# Altium PCB Player.PcbDoc (part 1 of 2)
Units mil, origin at the board's own origin, x right, y up, seen from the top; angles counter-clockwise.
Board outline 1181.1 x 2755.91 mil, 6 copper layers (Top Layer, Mid-Layer 1, Mid-Layer 2, Mid-Layer 3, Mid-Layer 4, Bottom Layer); 169 components, 289 nets, 1099 pads, 96 vias.
Unrouted connection lines stored in the file: 590.
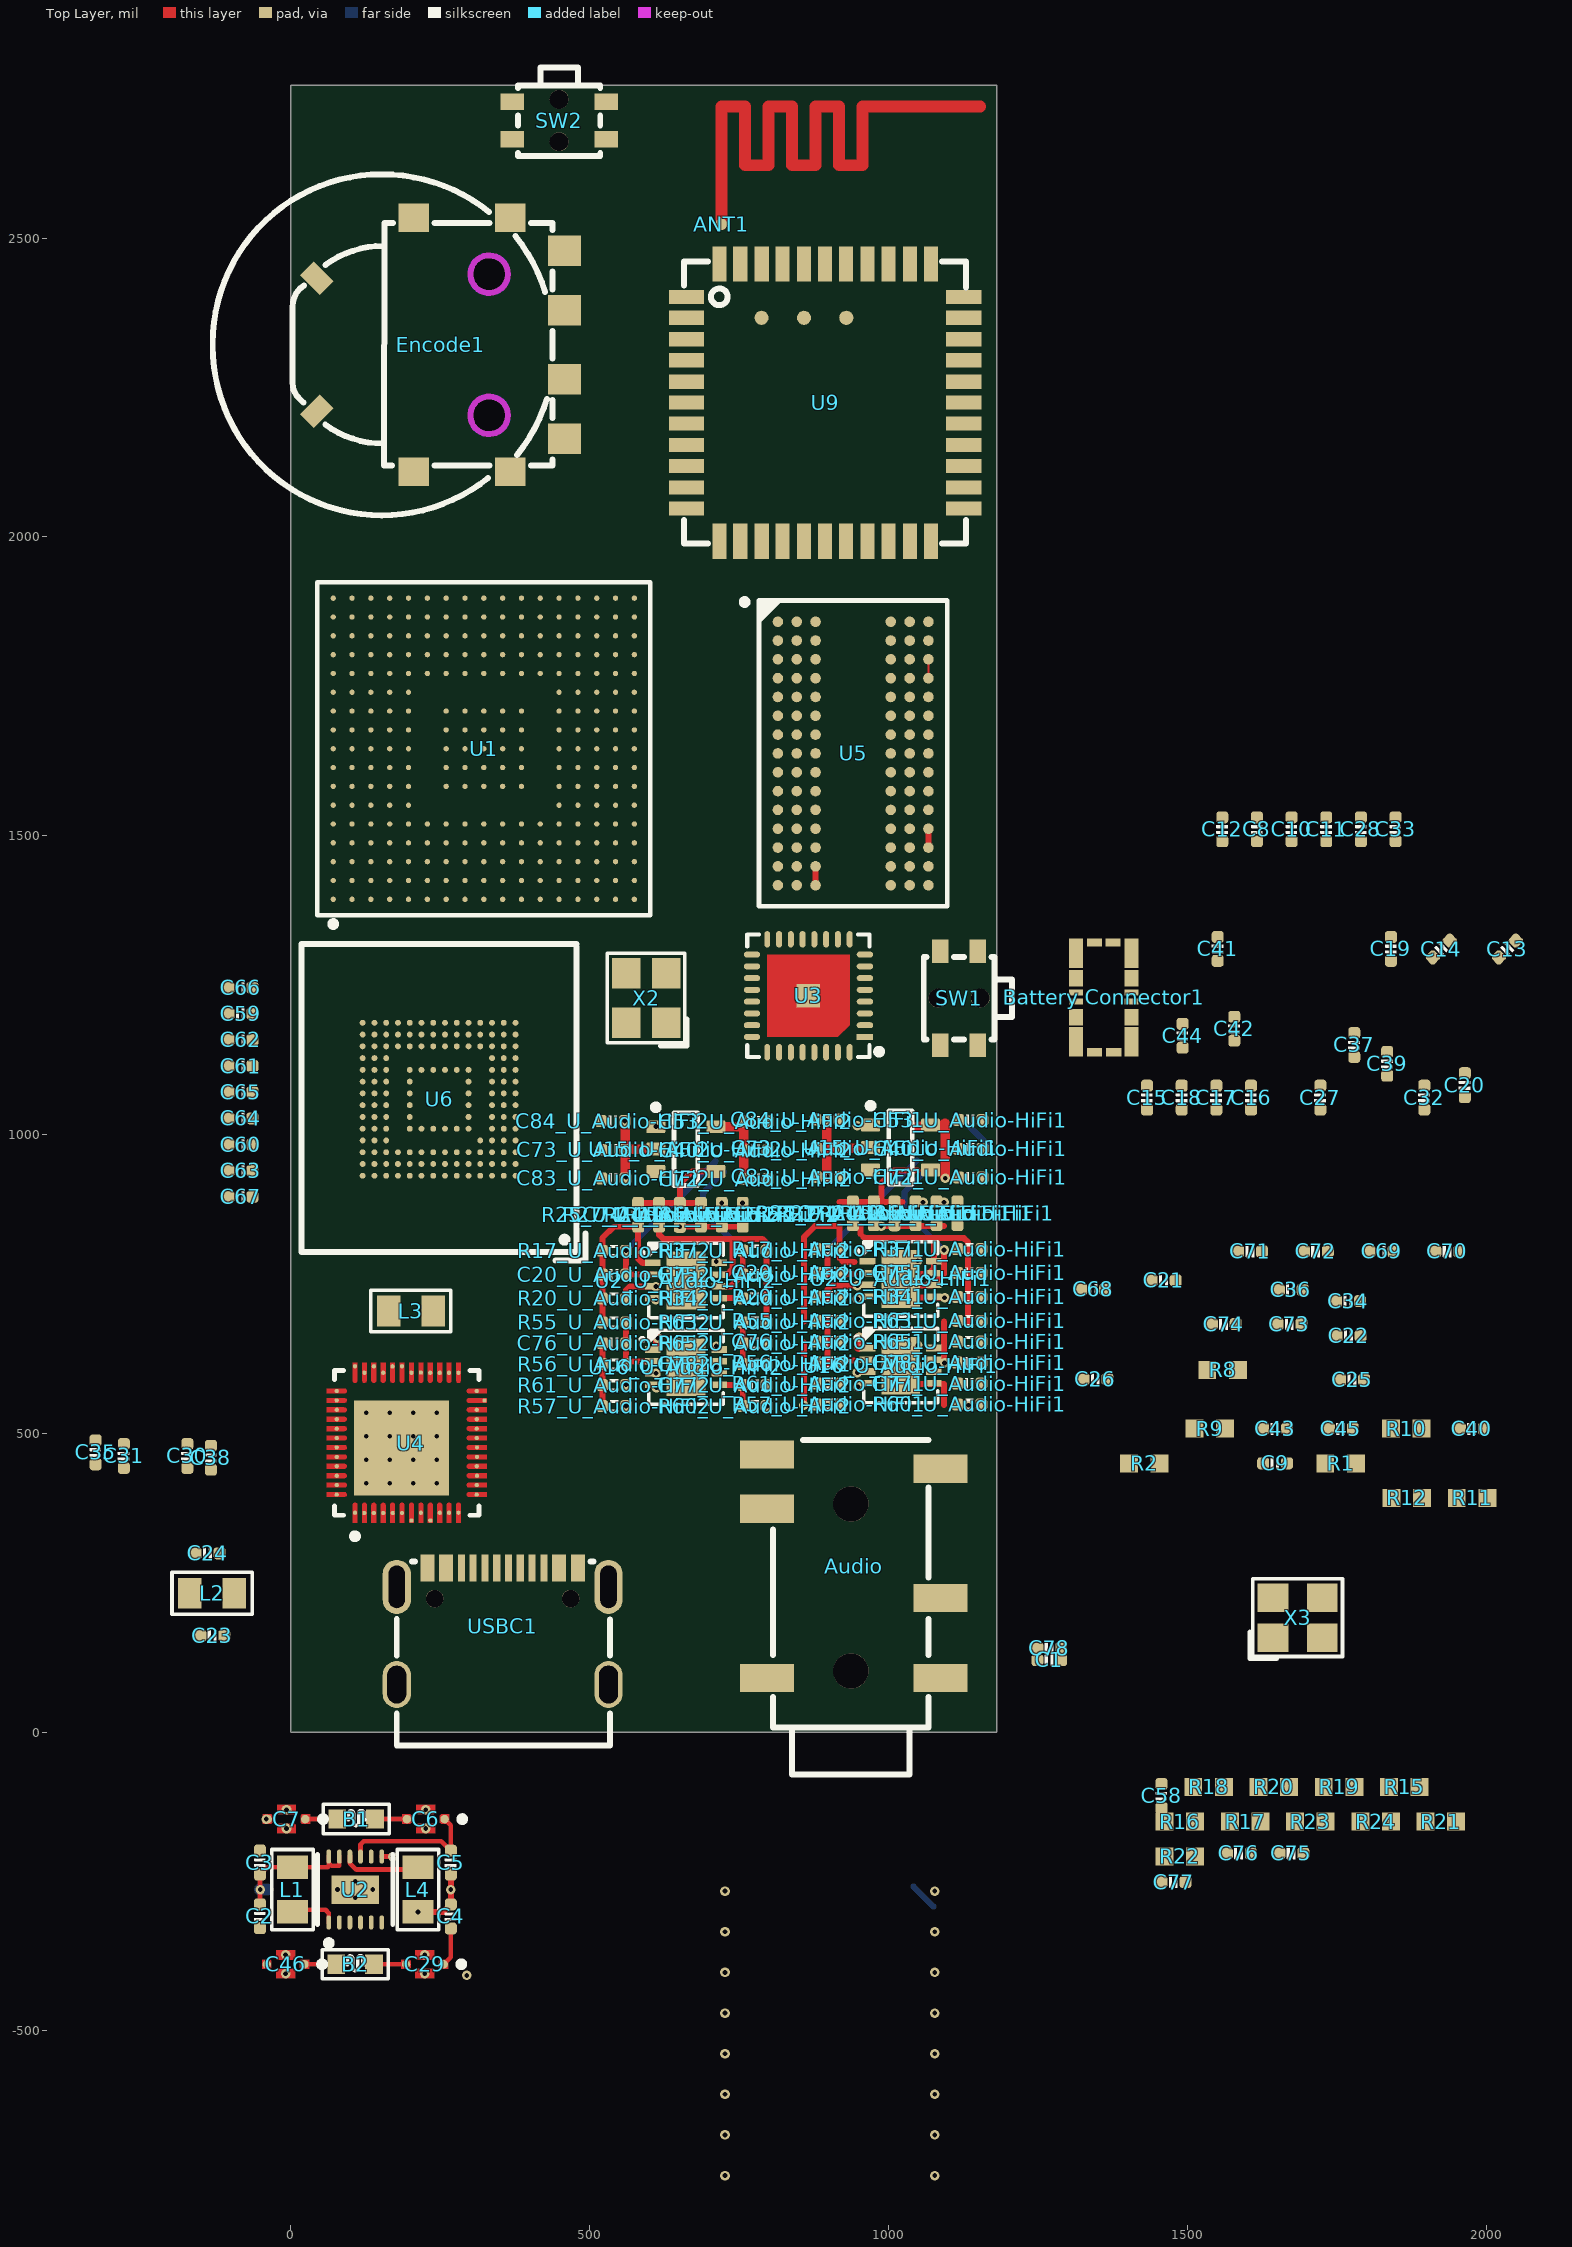
[diagram p0: Top Layer view]
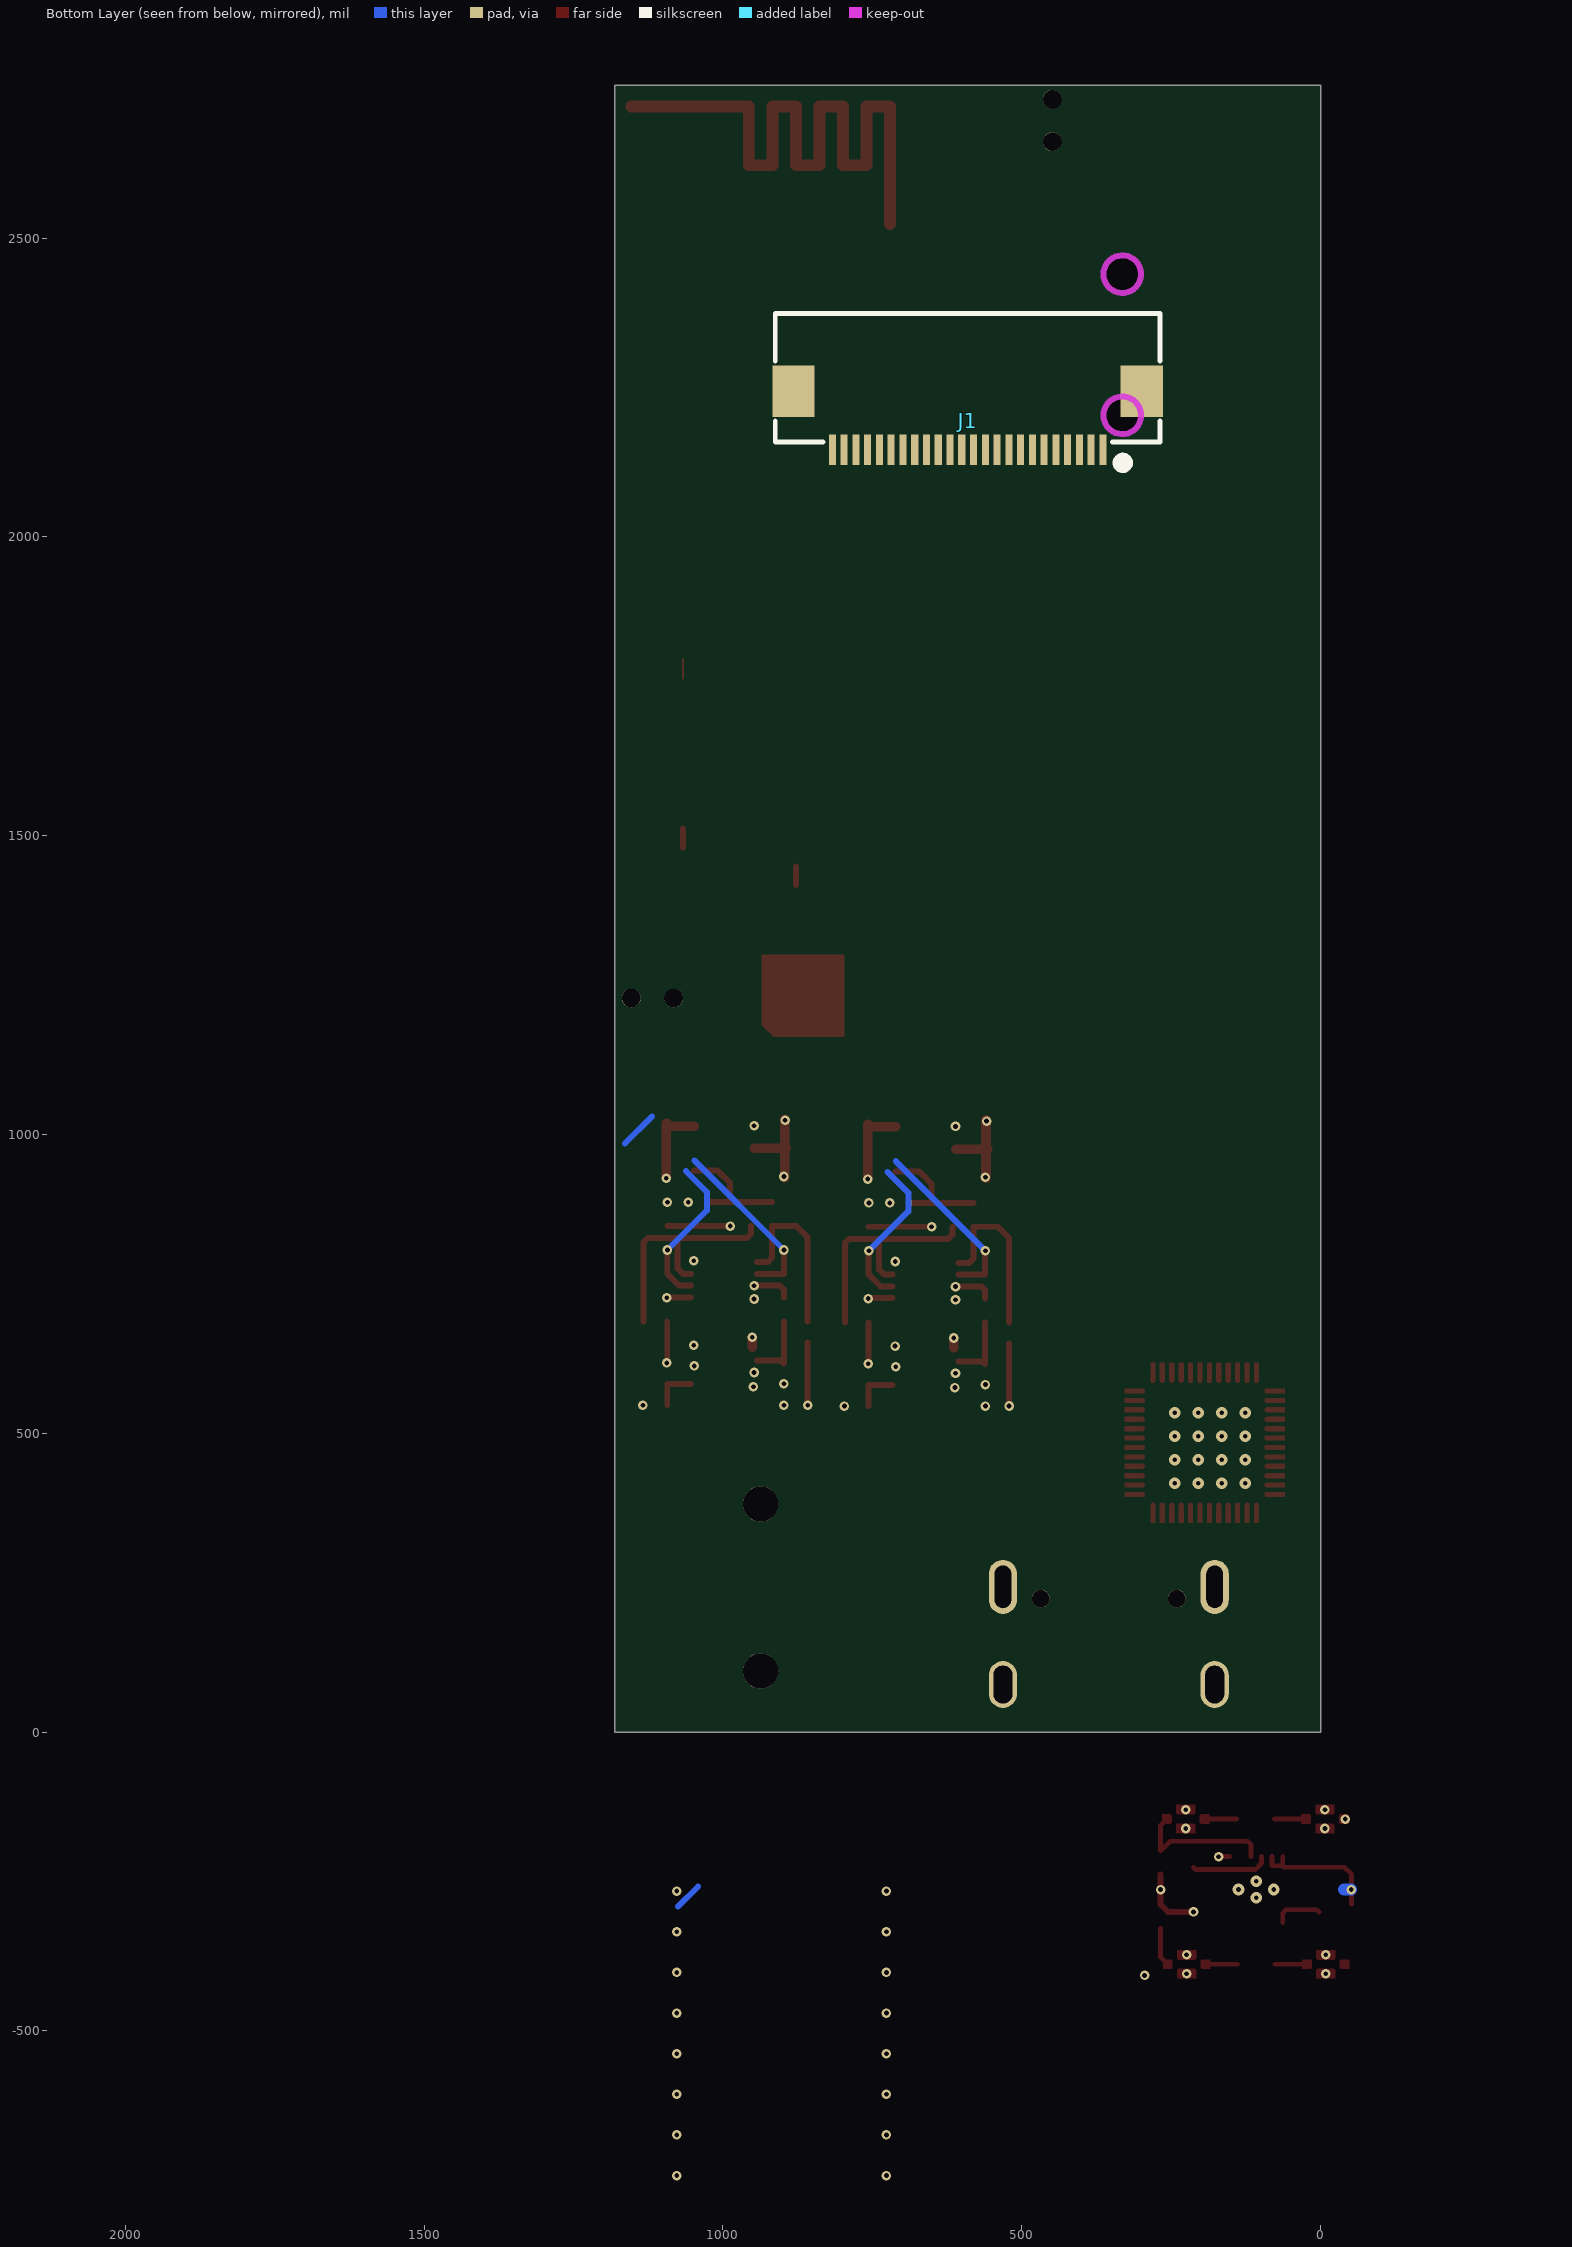
[diagram p1: Bottom Layer view, seen from below]
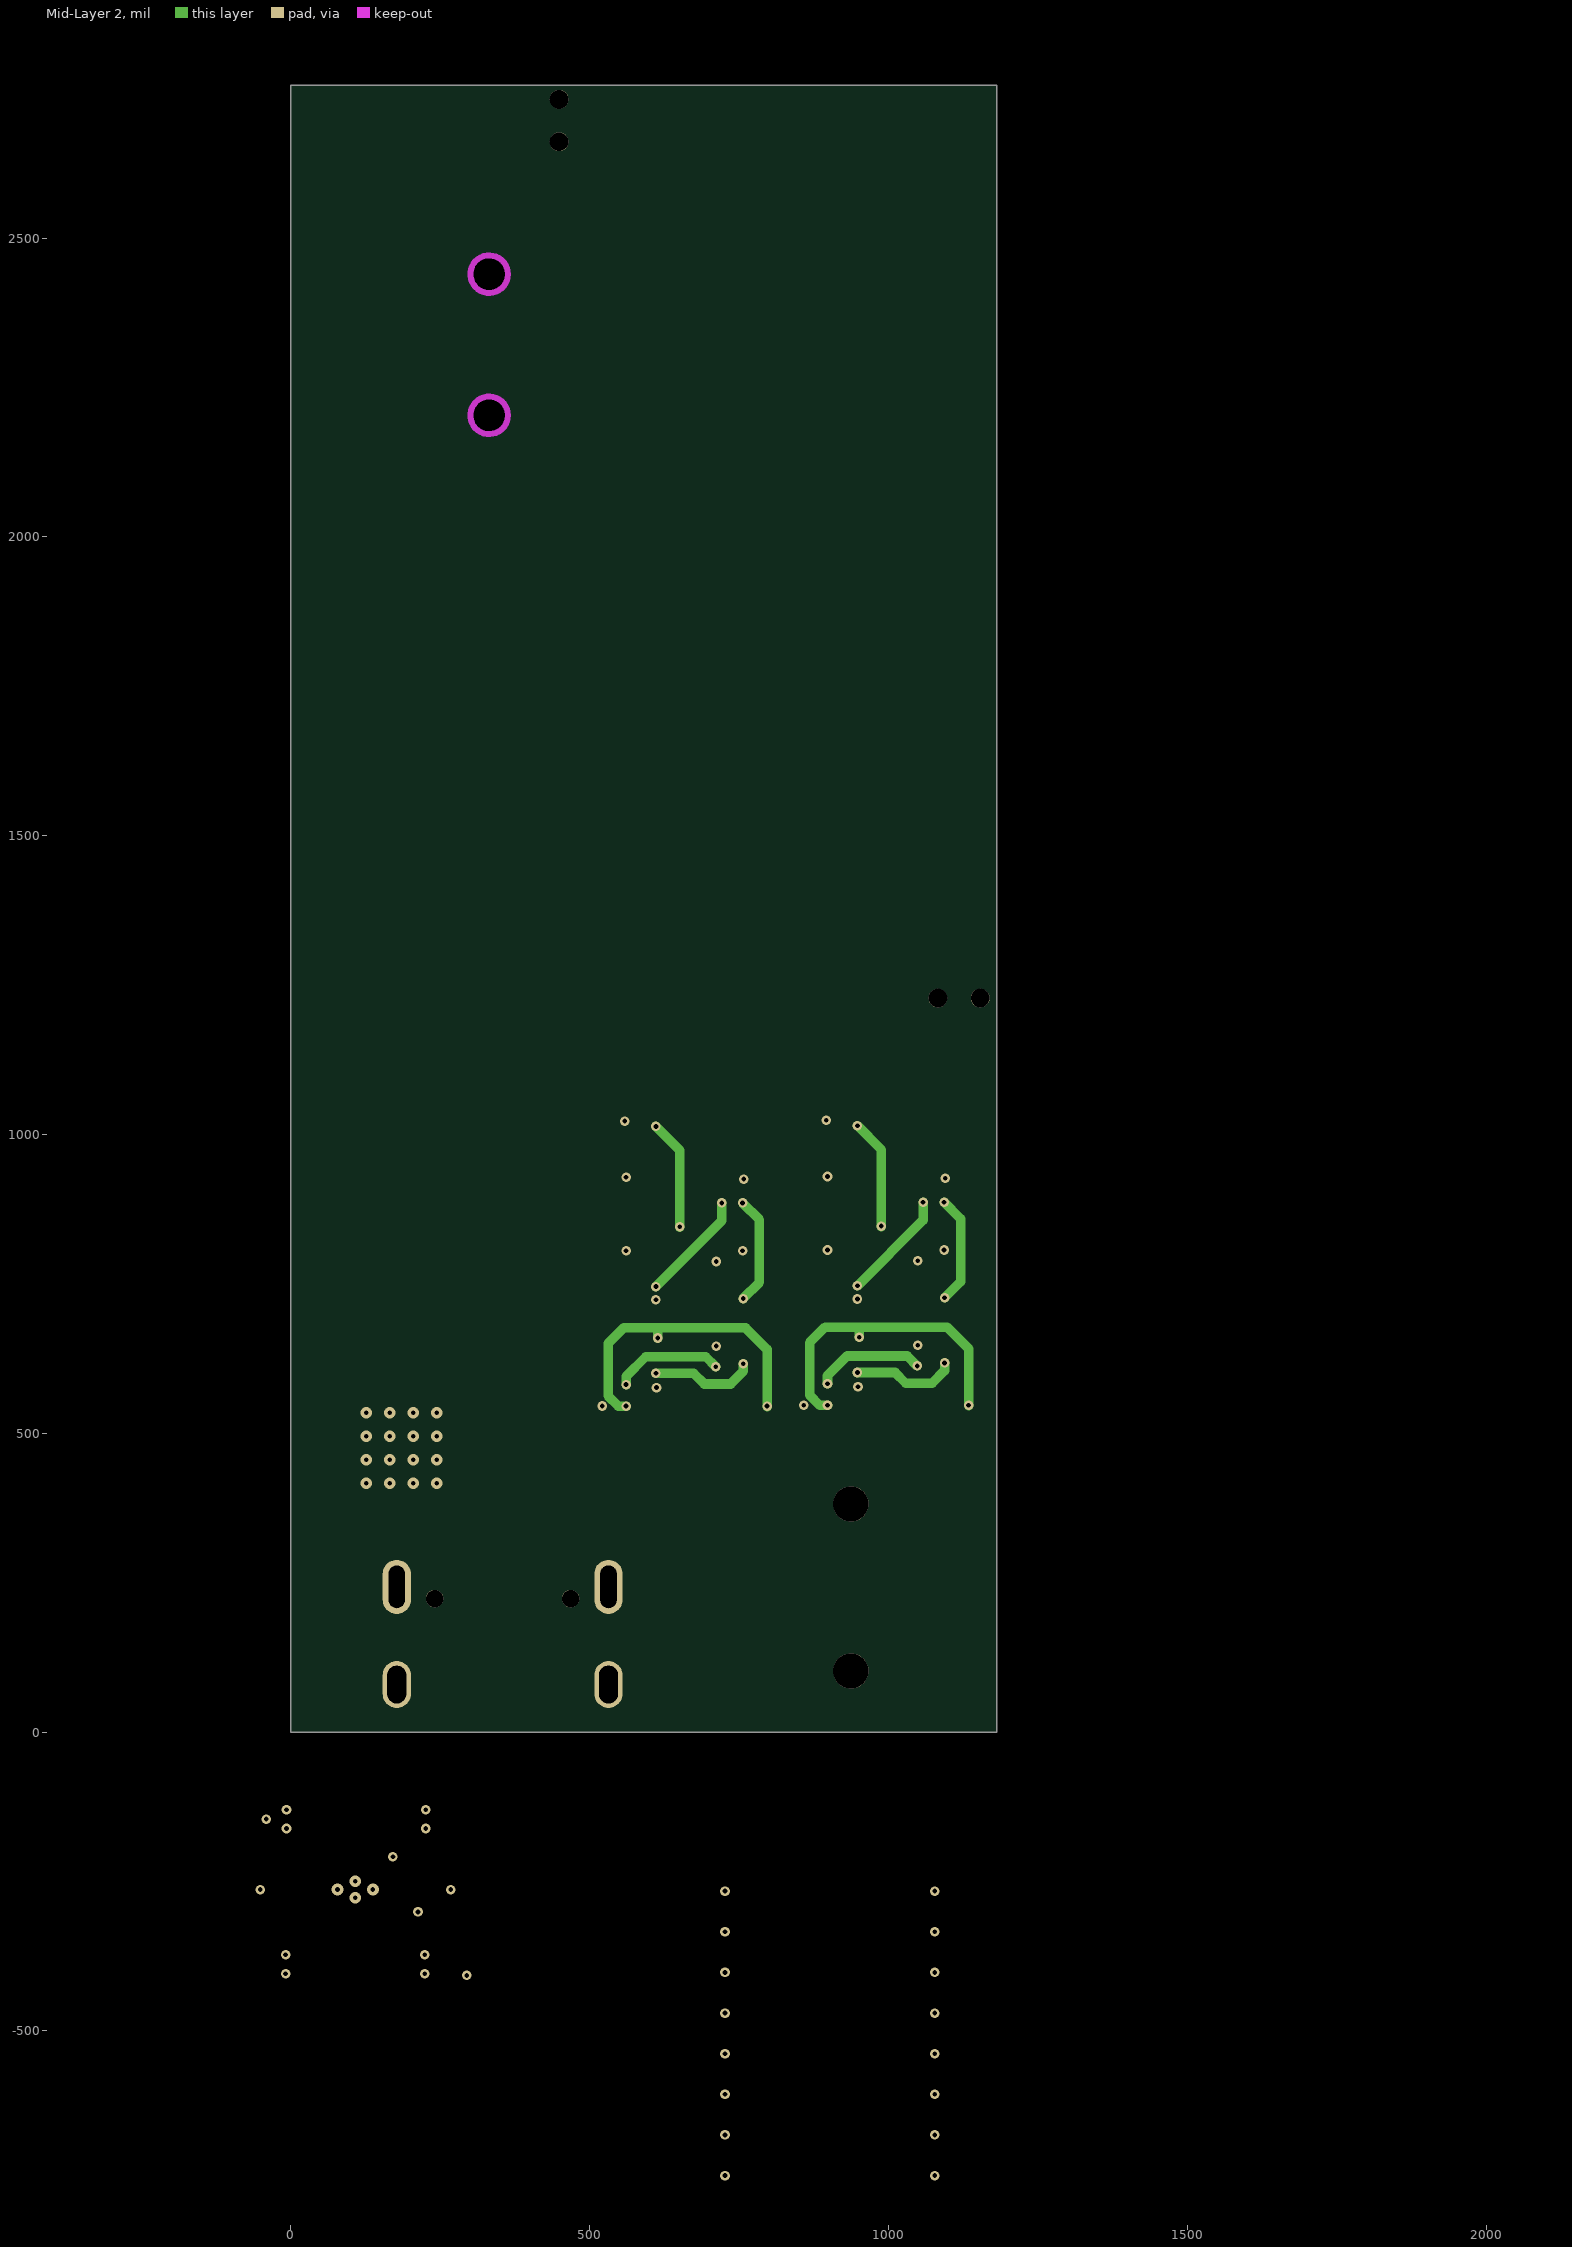
[diagram p2: Mid-Layer 2]
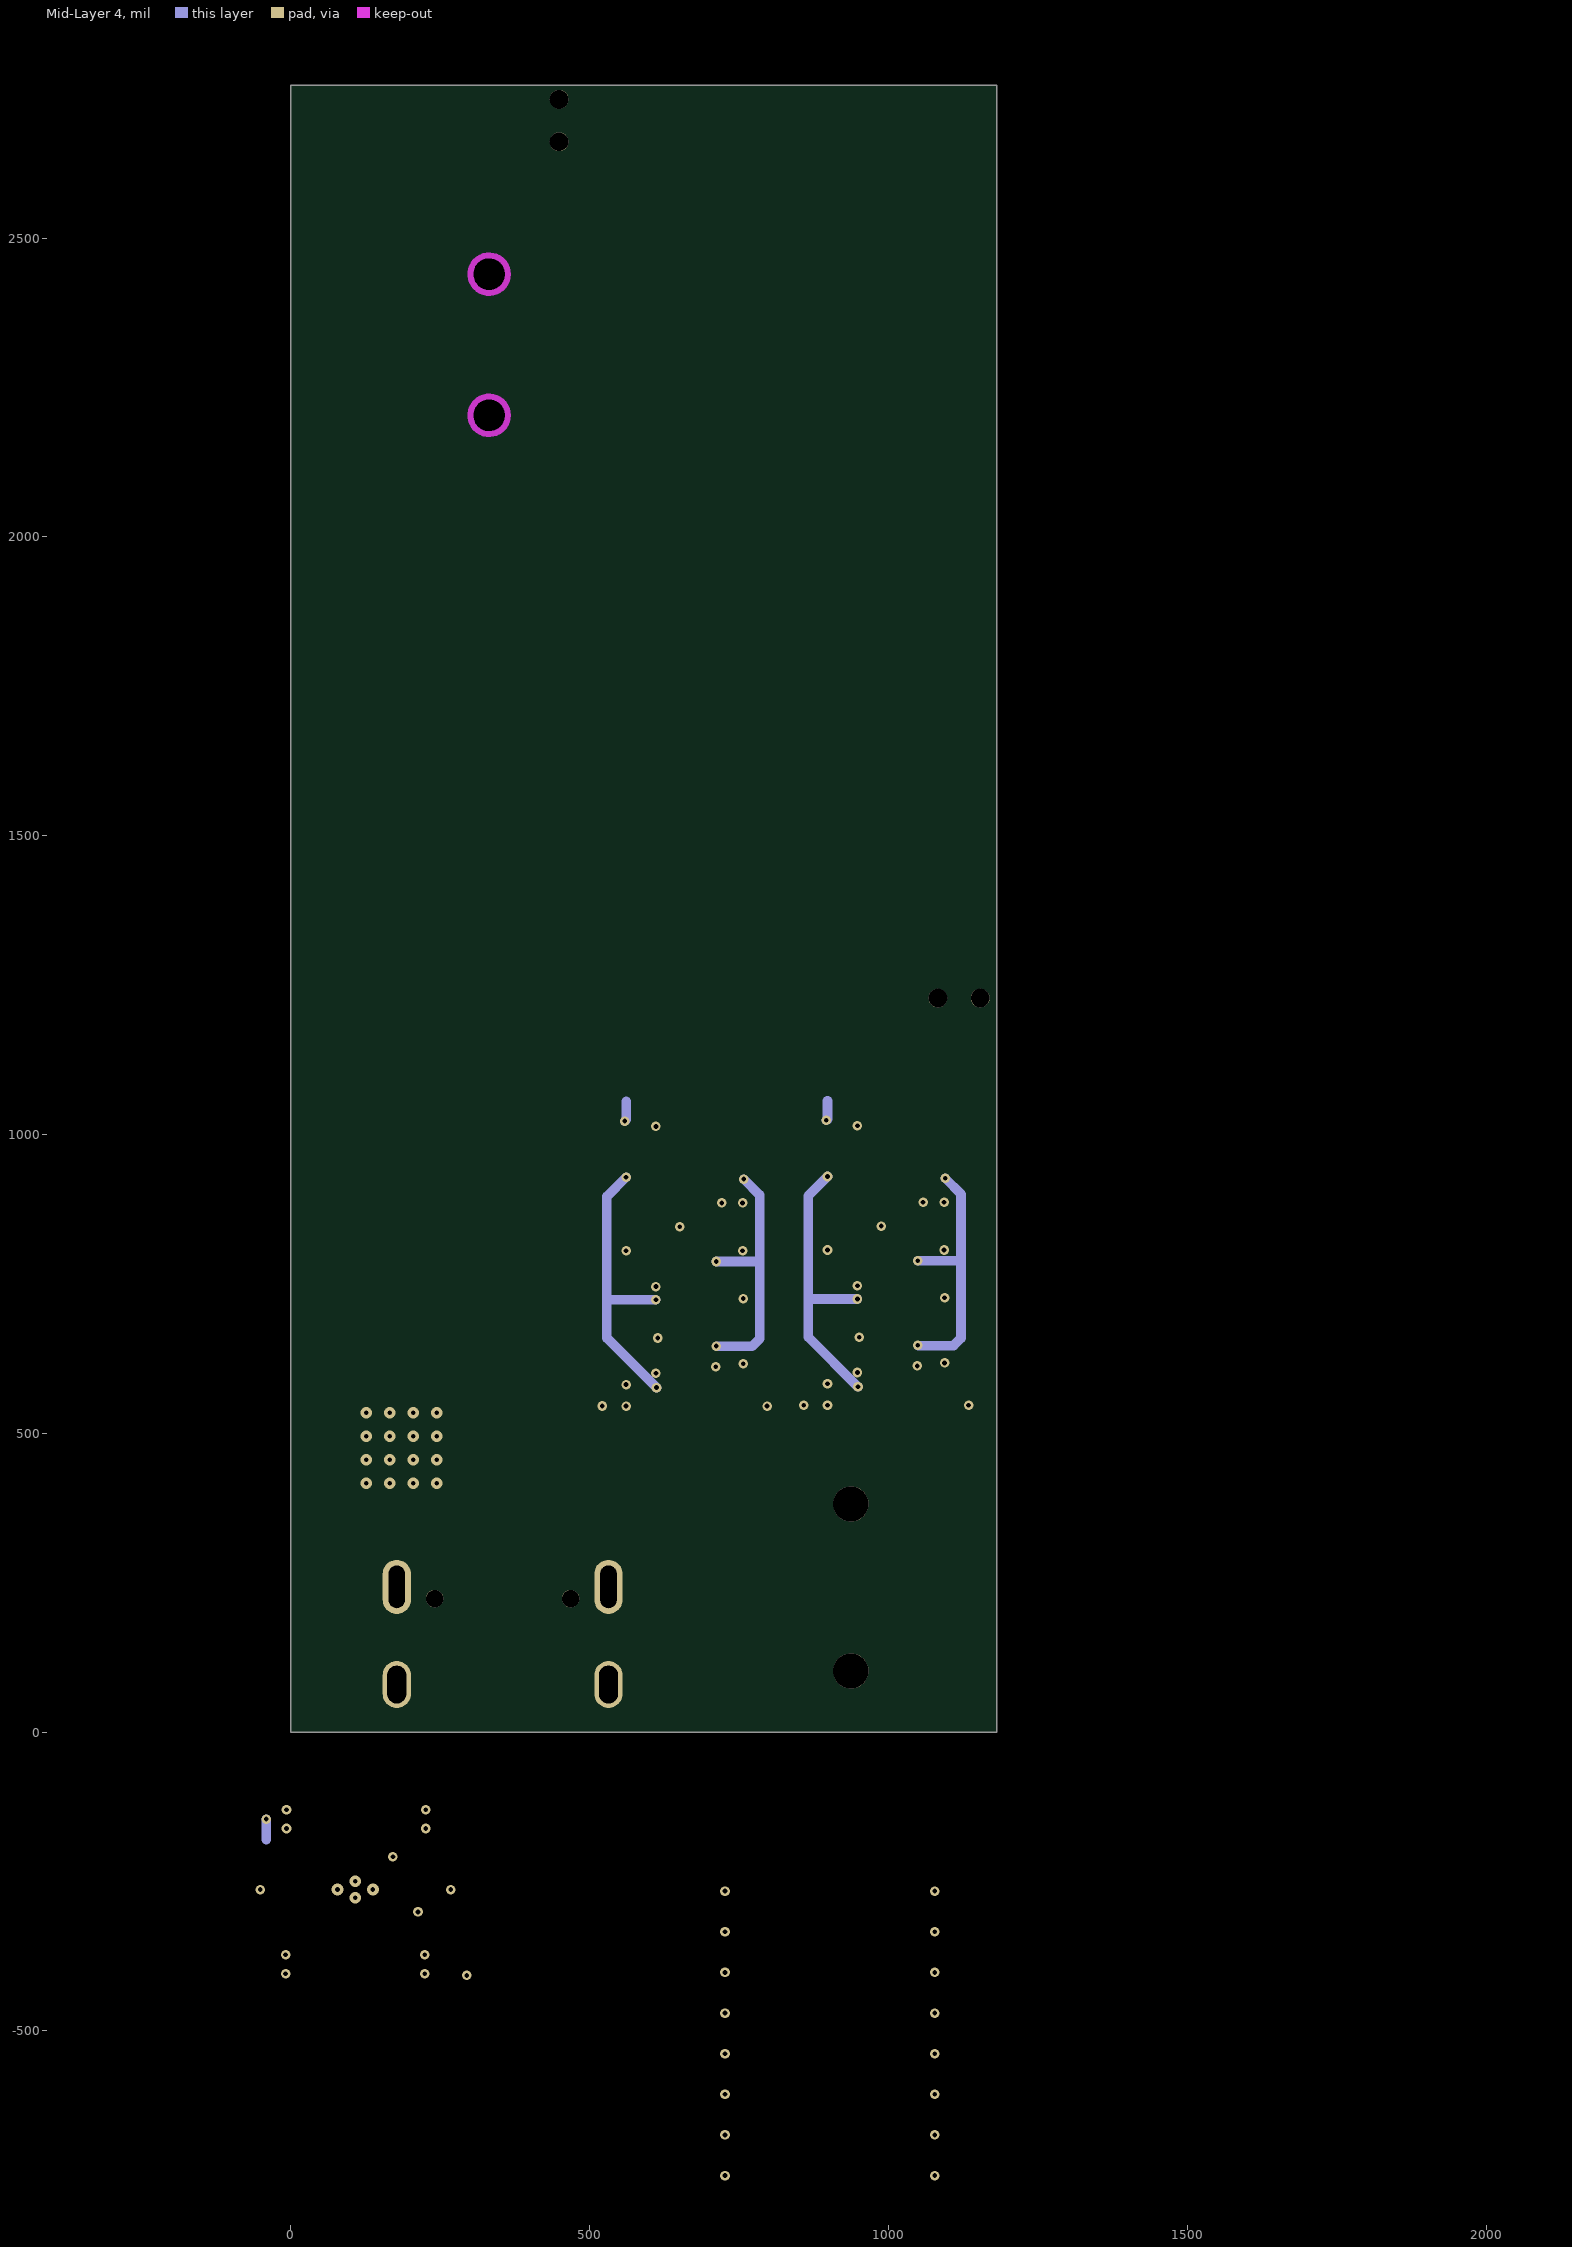
[diagram p3: Mid-Layer 4]

## Layer stack, top to bottom
Top Solder: solder mask 0.4, Solder Resist, Dk 3.5
Top Layer: signal copper 1.4
Dielectric 1: dielectric 12.6, FR-4, Dk 4.8
Mid-Layer 1: signal copper 1.4
Dielectric5: dielectric 12.6, FR-4, Dk 4.8
Mid-Layer 2: signal copper 1.4
Dielectric2: dielectric 12.6, FR-4, Dk 4.8
Mid-Layer 3: signal copper 1.4
Dielectric4: dielectric 12.6, FR-4, Dk 4.8
Mid-Layer 4: signal copper 1.4
Dielectric3: dielectric 12.6, FR-4, Dk 4.8
Bottom Layer: signal copper 1.4
Bottom Solder: solder mask 0.4, Solder Resist, Dk 3.5

## Board outline
0,0 0,2755.91 1181.1,2755.91 1181.1,0

## Design rules (kind name [scope] priority, off if disabled: settings)
Clearance [All] p1: gap=10 ignorepadtopadclearanceinfootprint=FALSE
DiffPairsRouting "Schematic Differential Pairs Routing_1" [InNetClass('MIPI')] p1: maxlimit=10 minlimit=4 mostfreqgap=6 toplayer_minwidth=4 toplayer_maxwidth=15 toplayer_prefwidth=6 midlayer1_minwidth=4 midlayer1_maxwidth=15 midlayer1_prefwidth=4 midlayer2_minwidth=4 midlayer2_maxwidth=15 midlayer2_prefwidth=4 midlayer3_minwidth=4 midlayer3_maxwidth=15 midlayer3_prefwidth=4 midlayer4_minwidth=4 midlayer4_maxwidth=15 midlayer4_prefwidth=4 bottomlayer_minwidth=4 bottomlayer_maxwidth=15 bottomlayer_prefwidth=6 maxuncoupledlength=100
DiffPairsRouting [All] p2: maxlimit=10 minlimit=10 mostfreqgap=10 toplayer_minwidth=15 toplayer_maxwidth=15 toplayer_prefwidth=15 midlayer1_minwidth=15 midlayer1_maxwidth=15 midlayer1_prefwidth=15 midlayer2_minwidth=15 midlayer2_maxwidth=15 midlayer2_prefwidth=15 midlayer3_minwidth=15 midlayer3_maxwidth=15 midlayer3_prefwidth=15 midlayer4_minwidth=15 midlayer4_maxwidth=15 midlayer4_prefwidth=15 bottomlayer_minwidth=15 bottomlayer_maxwidth=15 bottomlayer_prefwidth=15 maxuncoupledlength=500
MatchedLengths "Schematic Matched Net Lengths" [InNetClass('MIPI')] p1: tolerance=50 checknetsindiffpair=FALSE checkdiffpairvsdiffpair=TRUE checkxsignals=TRUE checkothers=TRUE
PolygonConnect [All] p1: connectstyle=Relief reliefconductorwidth=10 reliefentries=4 polygonreliefangle="90 Angle" airgapwidth=10
RoomDefinition U_Audio-HiFi2 [InComponentClass('U_Audio-HiFi2')] p1: confinementstyle=ConfineIn formatcopy=TRUE lockcomponents=FALSE outline 492.13,515.75 826.77,515.75 826.77,1066.93 492.13,1066.93
RoomDefinition U_Audio-HiFi1 [InComponentClass('U_Audio-HiFi1')] p2: confinementstyle=ConfineIn formatcopy=TRUE lockcomponents=FALSE outline 830.71,515.75 1165.35,515.75 1165.35,1066.93 830.71,1066.93
RoutingVias [All] p1: holewidth=28 width=50 viastyle="Through Hole" minholewidth=28 minwidth=50 maxholewidth=28 maxwidth=50
SolderMaskExpansion [All] p1: expansion=4 istentingtop=FALSE
SupplyNets "Schematic Supply Nets_13" [InNet('DCDC_VCC_Audio')] p1: voltage=0.000
SupplyNets "Schematic Supply Nets_7" [InNet('DCDC_VEE_Audio')] p2: voltage=0.000
SupplyNets "Schematic Supply Nets_6" [InNet('VEE_U_Audio-HiFi1')] p3: voltage=0.000
SupplyNets "Schematic Supply Nets_3" [InNet('VAudio')] p4: voltage=0.000
SupplyNets "Schematic Supply Nets_2" [InNet('VCC_U_Audio-HiFi1')] p5: voltage=0.000
SupplyNets "Schematic Supply Nets" [InNet('WL_+3V3')] p6: voltage=0.000
SupplyNets "Schematic Supply Nets_19" [InNet('VFBSMPS')] p7: voltage=0.000
SupplyNets "Schematic Supply Nets_18" [InNet('VDDCAPDSI')] p8: voltage=0.000
SupplyNets "Schematic Supply Nets_16" [InNet('VSYS')] p9: voltage=0.000
SupplyNets "Schematic Supply Nets_14" [InNet('VLDO2_3.3V')] p10: voltage=0.000
SupplyNets "Schematic Supply Nets_12" [InNet('VLDO3_1.8V')] p11: voltage=0.000
SupplyNets "Schematic Supply Nets_11" [InNet('VBUS')] p12: voltage=0.000
SupplyNets "Schematic Supply Nets_10" [InNet('VBATT')] p13: voltage=0.000
SupplyNets "Schematic Supply Nets_9" [InNet('VDCDC2')] p14: voltage=0.000
SupplyNets "Schematic Supply Nets_8" [InNet('VLDO1_1.8V')] p15: voltage=0.000
SupplyNets "Schematic Supply Nets_4" [InNet('VLDO4_3.3V')] p16: voltage=0.000
SupplyNets "Schematic Supply Nets_1" [InNet('VDCDC3')] p17: voltage=0.000
Width [All] p1: maxlimit=10 minlimit=10 preferedwidth=10
29 further rules are at their usual default settings.

## Classes and differential pairs
channel class Audio-HiFi: U_Audio-HiFi1 U_Audio-HiFi2
component class U_Audio-HiFi2: C20_U_Audio-HiFi2 C40_U_Audio-HiFi2 C53_U_Audio-HiFi2 C72_U_Audio-HiFi2 C73_U_Audio-HiFi2 C74_U_Audio-HiFi2 C75_U_Audio-HiFi2 C76_U_Audio-HiFi2 C77_U_Audio-HiFi2 C78_U_Audio-HiFi2 C83_U_Audio-HiFi2 C84_U_Audio-HiFi2 R17_U_Audio-HiFi2 R19_U_Audio-HiFi2 R20_U_Audio-HiFi2 R24_U_Audio-HiFi2 R25_U_Audio-HiFi2 R27_U_Audio-HiFi2 R34_U_Audio-HiFi2 R36_U_Audio-HiFi2 R37_U_Audio-HiFi2 R55_U_Audio-HiFi2 R56_U_Audio-HiFi2 R57_U_Audio-HiFi2 R60_U_Audio-HiFi2 R61_U_Audio-HiFi2 R63_U_Audio-HiFi2 R65_U_Audio-HiFi2 U2_U_Audio-HiFi2 U15_U_Audio-HiFi2 U16_U_Audio-HiFi2
component class U_Audio-HiFi1: C20_U_Audio-HiFi1 C40_U_Audio-HiFi1 C53_U_Audio-HiFi1 C72_U_Audio-HiFi1 C73_U_Audio-HiFi1 C74_U_Audio-HiFi1 C75_U_Audio-HiFi1 C76_U_Audio-HiFi1 C77_U_Audio-HiFi1 C78_U_Audio-HiFi1 C83_U_Audio-HiFi1 C84_U_Audio-HiFi1 R17_U_Audio-HiFi1 R19_U_Audio-HiFi1 R20_U_Audio-HiFi1 R24_U_Audio-HiFi1 R25_U_Audio-HiFi1 R27_U_Audio-HiFi1 R34_U_Audio-HiFi1 R36_U_Audio-HiFi1 R37_U_Audio-HiFi1 R55_U_Audio-HiFi1 R56_U_Audio-HiFi1 R57_U_Audio-HiFi1 R60_U_Audio-HiFi1 R61_U_Audio-HiFi1 R63_U_Audio-HiFi1 R65_U_Audio-HiFi1 U2_U_Audio-HiFi1 U15_U_Audio-HiFi1 U16_U_Audio-HiFi1
differential pair class MIPI: DSI_CK DSI_D0 DSI_D1
net class MIPI: DSI_CK_N DSI_CK_P DSI_D0_N DSI_D0_P DSI_D1_N DSI_D1_P
component class Player: ANT1 Audio B1 B2 "Battery Connector1" C1 C2 C3 C4 C5 C6 C7 C8 C9 C10 C11 C12 C13 C14 C15 C16 C17 C18 C19 C20 C21 C22 C23 C24 C25 C26 C27 C28 C29 C30 C31 C32 C33 C34 C35 C36 C37 C38 C39 C40 C41 C42 C43 C44 C45 C46 C58 C59 C60 C61 C62 C63 C64 C65 C66 C67 C68 C69 C70 C71 C72 C73 C74 C75 C76 C77 C78 Encode1 J1 L1 L2 L3 L4 R1 R2 R8 R9 R10 R11 R12 R15 R16 R17 R18 R19 R20 R21 R22 R23 R24 SW1 SW2 U1 U2 U3 U4 U5 U6 U9 USBC1 X2 X3
differential pair Audio_DAC2: +Audio_DAC2_P -Audio_DAC2_N
differential pair Audio_DAC1: +Audio_DAC1_P -Audio_DAC1_N
differential pair DSI_D1: +DSI_D1_P -DSI_D1_N
differential pair DSI_D0: +DSI_D0_P -DSI_D0_N
differential pair DSI_CK: +DSI_CK_P -DSI_CK_N

## Components (designator, comment, footprint, x,y, rotation, side; value= is the part's Value field where it differs from the comment)
ANT1 "ANT1" 2.4GANTS9 720.47,2523.62 r0 top
Audio "PJ342" PJ342A 937.01,-70.87 r180 top (schematic designator Audio1)
B1 "BLM15AG601SN1D" L0603 109.17,-145.53 r0 top
B2 "BLM15AG601SN1D" L0603 107.67,-388.4 r0 top
"Battery Connector1" "BM25-4S" BM25-4S/2-V-51 1360.19,1229.46 r90 top
C1 "1uF" 0402-C 1269.15,120.73 r0 top value=0.1u
C2 "10uF" 0402-C -51.77,-308.12 r90 top value=0.1u
C3 "0.1uF" 0402-C -51.77,-218.27 r270 top value=0.1u
C4 "10uF" 0402-C 267.67,-308.4 r270 top value=0.1u
C5 "10uF" 0402-C 267.67,-218.4 r90 top value=0.1u
C6 "NFM18PS105D0J3D" FP-NFM18-0_1-e0_05_0_35-MFG 225.66,-145.53 r180 top
C7 "NFM18PS105D0J3D" FP-NFM18-0_1-e0_05_0_35-MFG -7.33,-145.53 r180 top
C8 "0.1uF" 0402-C 1616.63,1510.85 r270 top value=0.1u
C9 "0.1uF" 0402-C 1646.99,449.87 r0 top value=0.1u
C10 "0.1uF" 0402-C 1674.63,1510.85 r90 top value=0.1u
C11 "0.1uF" 0402-C 1732.63,1510.85 r270 top value=0.1u
C12 "0.1uF" 0402-C 1558.63,1510.85 r270 top value=0.1u
C13 "0.1uF" 0402-C 2035.71,1310.5 r45 top value=0.1u
C14 "0.1uF" 0402-C 1925.2,1310.5 r45 top value=0.1u
C15 "0.1uF" 0402-C 1432.72,1061.8 r90 top value=0.1u
C16 "0.1uF" 0402-C 1606.72,1061.8 r90 top value=0.1u
C17 "0.1uF" 0402-C 1548.72,1061.8 r90 top value=0.1u
C18 "0.1uF" 0402-C 1490.72,1061.8 r90 top value=0.1u
C19 "0.1uF" 0402-C 1840.95,1310.75 r270 top value=0.1u
C20 "10uF" 0402-C 1964.57,1082.68 r270 top value=0.1u
C20_U_Audio-HiFi1 "360p" 0402-C 900.45,768.36 r0 top value=0.1u (schematic designator C20)
C20_U_Audio-HiFi2 "360p" 0402-C 541.16,765.76 r0 top value=0.1u (schematic designator C20)
C21 "0.1uF" 0402-C 1460.63,755.91 r0 top value=0.1u
C22 "10uF" 0402-C 1770.09,663.24 r0 top value=0.1u
C23 "10uF" 0402-C -131.42,161.42 r180 top value=0.1u
C24 "10uF" 0402-C -139.29,299.21 r180 top value=0.1u
C25 "10uF" 0402-C 1775.91,589.5 r0 top value=0.1u
C26 "0.1uF" 0402-C 1346.46,590.55 r0 top value=0.1u
C27 "3.9p" 0402-C 1722.72,1061.8 r90 top value=0.1u
C28 "3.9p" 0402-C 1790.63,1510.85 r90 top value=0.1u
C29 "NFM18PS105D0J3D" FP-NFM18-0_1-e0_05_0_35-MFG 224.17,-388.4 r180 top
C30 "10uF" 0402-C -173.23,462.13 r270 top value=0.1u
C31 "10uF" 0402-C -279.53,462.13 r270 top value=0.1u
C32 "10uF" 0402-C 1896.72,1061.8 r270 top value=0.1u
C33 "10uF" 0402-C 1848.63,1510.85 r270 top value=0.1u
C34 "10uF" 0402-C 1769.28,721.24 r0 top value=0.1u
C35 "10uF" 0402-C -326.77,468.19 r270 top value=0.1u
C36 "10uF" 0402-C 1673.23,740.16 r0 top value=0.1u
C37 "0.1uF" 0402-C 1779.53,1149.92 r90 top value=0.1u
C38 "10uF" 0402-C -133.86,459.13 r90 top value=0.1u
C39 "10uF" 0402-C 1834.65,1118.43 r90 top value=0.1u
C40 "10uF" 0402-C 1976.17,507.87 r0 top value=0.1u
C40_U_Audio-HiFi1 "10u" 0402-C 1137.17,976.18 r0 top value=0.1u (schematic designator C40)
C40_U_Audio-HiFi2 "10u" 0402-C 777.87,973.58 r0 top value=0.1u (schematic designator C40)
C41 "10uF" 0402-C 1550.95,1310.75 r270 top value=0.1u
C42 "10uF" 0402-C 1578.74,1177.17 r270 top value=0.1u
C43 "0.1uF" 0402-C 1646.99,507.87 r0 top value=0.1u
C44 "0.1uF" 0402-C 1492.13,1165.35 r270 top value=0.1u
C45 "0.1uF" 0402-C 1756.99,507.87 r0 top value=0.1u
C46 "NFM18PS105D0J3D" FP-NFM18-0_1-e0_05_0_35-MFG -8.83,-388.4 r180 top
C53_U_Audio-HiFi1 "1u" 0402-C 1137.17,1024.18 r0 top value=0.1u (schematic designator C53)
C53_U_Audio-HiFi2 "1u" 0402-C 777.87,1021.58 r0 top value=0.1u (schematic designator C53)
C58 "1uF" 0402-C 1457.07,-106.8 r90 top value=0.1u
C59 "100nF" 0402-C -84.27,1202.12 r180 top value=0.1u
C60 "100nF" 0402-C -84.27,983.38 r180 top value=0.1u
C61 "100nF" 0402-C -84.27,1114.63 r180 top value=0.1u
C62 "100nF" 0402-C -84.27,1158.37 r180 top value=0.1u
C63 "100nF" 0402-C -84.27,939.63 r180 top value=0.1u
C64 "100nF" 0402-C -84.27,1027.13 r180 top value=0.1u
C65 "100nF" 0402-C -84.27,1070.88 r180 top value=0.1u
C66 "100nF" 0402-C -84.27,1245.87 r180 top value=0.1u
C67 "100nF" 0402-C -84.27,895.89 r180 top value=0.1u
C68 "1uF" 0402-C 1342.72,740.93 r0 top value=0.1u
C69 "1uF" 0402-C 1825.21,804.36 r0 top value=0.1u
C70 "1uF" 0402-C 1935.21,804.36 r0 top value=0.1u
C71 "1uF" 0402-C 1605.21,804.36 r0 top value=0.1u
C72 "1uF" 0402-C 1715.21,804.36 r0 top value=0.1u
C72_U_Audio-HiFi1 "0.1u" 0402-C 1137.17,928.18 r0 top (schematic designator C72)
C72_U_Audio-HiFi2 "0.1u" 0402-C 777.87,925.58 r0 top (schematic designator C72)
C73 "1uF" 0402-C 1671.09,682.93 r0 top value=0.1u
C73_U_Audio-HiFi1 "10u" 0402-C 899.17,977.18 r0 top value=0.1u (schematic designator C73)
C73_U_Audio-HiFi2 "10u" 0402-C 539.87,974.58 r0 top value=0.1u (schematic designator C73)
C74 "1uF" 0402-C 1561.09,682.93 r0 top value=0.1u
C74_U_Audio-HiFi1 "360p" 0402-C 1010.17,868.18 r270 top value=0.1u (schematic designator C74)
C74_U_Audio-HiFi2 "360p" 0402-C 650.87,865.58 r270 top value=0.1u (schematic designator C74)
C75 "10pF" 0402-C 1674.25,-202.8 r0 top value=0.1u
C75_U_Audio-HiFi1 "360p" 0402-C 1135.45,768.36 r0 top value=0.1u (schematic designator C75)
C75_U_Audio-HiFi2 "360p" 0402-C 776.16,765.76 r0 top value=0.1u (schematic designator C75)
C76 "1uF" 0402-C 1586.25,-202.8 r0 top value=0.1u
C76_U_Audio-HiFi1 "820p" 0402-C 900.45,653.36 r0 top value=0.1u (schematic designator C76)
C76_U_Audio-HiFi2 "820p" 0402-C 541.16,650.76 r0 top value=0.1u (schematic designator C76)
C77 "12p" 0402-C 1477.07,-250.8 r0 top value=0.1u
C77_U_Audio-HiFi1 "1800p" 0402-C 1135.45,583.36 r180 top value=0.1u (schematic designator C77)
C77_U_Audio-HiFi2 "1800p" 0402-C 776.16,580.76 r180 top value=0.1u (schematic designator C77)
C78 "12p" 0402-C 1269.15,140.42 r0 top value=0.1u
C78_U_Audio-HiFi1 "820p" 0402-C 1135.45,618.36 r180 top value=0.1u (schematic designator C78)
C78_U_Audio-HiFi2 "820p" 0402-C 776.16,615.76 r180 top value=0.1u (schematic designator C78)
C83_U_Audio-HiFi1 "1u" 0402-C 899.17,929.18 r0 top value=0.1u (schematic designator C83)
C83_U_Audio-HiFi2 "1u" 0402-C 539.87,926.58 r0 top value=0.1u (schematic designator C83)
C84_U_Audio-HiFi1 "0.1u" 0402-C 898.17,1025.18 r0 top (schematic designator C84)
C84_U_Audio-HiFi2 "0.1u" 0402-C 538.87,1022.58 r0 top (schematic designator C84)
Encode1 "SIQ-02FVS3" SW-SMD_SIQ-02FVS3_1 250.56,2321.72 r90 top
J1 "YDP290H001-V3" FPC0.5-WT-24P 590.55,2244.09 r0 bottom locked
L1 "4.7uH" L0805 2.67,-263.4 r90 top
L2 "2.2uH" L0805 -131.89,232.28 r180 top
L3 "2.2uH" L0805 200.79,704.72 r0 top
L4 "4.7uH" L0805 212.67,-263.4 r270 top
R1 "5.1k" 0603-R 1756.58,449.87 r180 top
R2 "5.1k" 0603-R 1428.22,449.87 r180 top
R8 "10K" 0603-R 1559.06,606.3 r180 top
R9 "10K" 0603-R 1537.4,507.87 r180 top
R10 "10K" 0603-R 1866.59,507.88 r0 top
R11 "10K" 0603-R 1976.59,391.88 r0 top
R12 "10K" 0603-R 1867.4,391.87 r180 top
R15 "47k" 0603-R 1863.21,-91.79 r0 top
R16 "47k" 0603-R 1487.66,-149.79 r0 top
R17 "47k" 0603-R 1596.85,-149.79 r0 top
R17_U_Audio-HiFi1 "1.8k" 0402-R 900.17,808.18 r180 top (schematic designator R17)
R17_U_Audio-HiFi2 "1.8k" 0402-R 540.87,805.58 r180 top (schematic designator R17)
R18 "47k" 0603-R 1535.66,-91.79 r0 top
R19 "47k" 0603-R 1754.03,-91.79 r0 top
R19_U_Audio-HiFi1 "4.3" 0402-R 1080.45,868.36 r90 top (schematic designator R19)
R19_U_Audio-HiFi2 "4.3" 0402-R 721.16,865.76 r90 top (schematic designator R19)
R20 "10k" 0603-R 1644.85,-91.79 r0 top
R20_U_Audio-HiFi1 "3.2k" 0402-R 900.45,728.36 r0 top (schematic designator R20)
R20_U_Audio-HiFi2 "3.2k" 0402-R 541.16,725.76 r0 top (schematic designator R20)
R21 "10k" 0603-R 1924.39,-149.79 r0 top
R22 "10k" 0603-R 1487.66,-207.79 r0 top
R23 "10k" 0603-R 1706.03,-149.79 r0 top
R24 "10k" 0603-R 1815.21,-149.79 r0 top
R24_U_Audio-HiFi1 "10k" 0402-R 1045.45,868.36 r90 top (schematic designator R24)
R24_U_Audio-HiFi2 "10k" 0402-R 686.16,865.76 r90 top (schematic designator R24)
R25_U_Audio-HiFi1 "10k" 0402-R 940.45,868.36 r90 top (schematic designator R25)
R25_U_Audio-HiFi2 "10k" 0402-R 581.16,865.76 r90 top (schematic designator R25)
R27_U_Audio-HiFi1 "10k" 0402-R 975.45,868.36 r270 top (schematic designator R27)
R27_U_Audio-HiFi2 "10k" 0402-R 616.16,865.76 r270 top (schematic designator R27)
R34_U_Audio-HiFi1 "3.2k" 0402-R 1135.45,728.36 r0 top (schematic designator R34)
R34_U_Audio-HiFi2 "3.2k" 0402-R 776.16,725.76 r0 top (schematic designator R34)
R36_U_Audio-HiFi1 "4.3" 0402-R 1115.45,868.36 r90 top (schematic designator R36)
R36_U_Audio-HiFi2 "4.3" 0402-R 756.16,865.76 r90 top (schematic designator R36)
R37_U_Audio-HiFi1 "1.8k" 0402-R 1135.45,808.36 r180 top (schematic designator R37)
R37_U_Audio-HiFi2 "1.8k" 0402-R 776.16,805.76 r180 top (schematic designator R37)
R55_U_Audio-HiFi1 "1.6k" 0402-R 900.45,688.36 r0 top (schematic designator R55)
R55_U_Audio-HiFi2 "1.6k" 0402-R 541.16,685.76 r0 top (schematic designator R55)
R56_U_Audio-HiFi1 "348" 0402-R 900.45,618.36 r180 top (schematic designator R56)
R56_U_Audio-HiFi2 "348" 0402-R 541.16,615.76 r180 top (schematic designator R56)
R57_U_Audio-HiFi1 "10" 0402-R 900.45,548.36 r180 top (schematic designator R57)
R57_U_Audio-HiFi2 "10" 0402-R 541.16,545.76 r180 top (schematic designator R57)
R60_U_Audio-HiFi1 "249" 0402-R 1135.45,548.36 r180 top (schematic designator R60)
R60_U_Audio-HiFi2 "249" 0402-R 776.16,545.76 r180 top (schematic designator R60)
R61_U_Audio-HiFi1 "10" 0402-R 900.45,583.36 r0 top (schematic designator R61)
R61_U_Audio-HiFi2 "10" 0402-R 541.16,580.76 r0 top (schematic designator R61)
R63_U_Audio-HiFi1 "1.6k" 0402-R 1135.45,688.36 r180 top (schematic designator R63)
R63_U_Audio-HiFi2 "1.6k" 0402-R 776.16,685.76 r180 top (schematic designator R63)
R65_U_Audio-HiFi1 "348" 0402-R 1135.45,653.36 r0 top (schematic designator R65)
R65_U_Audio-HiFi2 "348" 0402-R 776.16,650.76 r0 top (schematic designator R65)
SW1 "TD-1187SA-250" SW-SMD-3.5*3.0_4P 1118.11,1228.35 r270 top
SW2 "TD-1187SA-250" SW-SMD-3.5*3.0_4P 448.82,2696.85 r0 top
U1 "STM32H747XIH6" FP-TFBGA240+25-A07U-MFG 322.83,1645.67 r90 top
U2 "TPS65133DPDR" FP-DPD0012A-MFG 107.67,-263.4 r90 top
U2_U_Audio-HiFi1 "AD8066ARZ-R7" DFN-8_L3.0-W3.0-P0.50-BL-EP 1020.45,758.36 r270 top (schematic designator U2)
U2_U_Audio-HiFi2 "AD8066ARZ-R7" DFN-8_L3.0-W3.0-P0.50-BL-EP 661.16,755.76 r270 top (schematic designator U2)
U3 "ES9039Q2M" "QFN32 5x5_L" 866.14,1232.28 r90 top
U4 "TPS65217DRSLR" FP-RSL0048A-MFG 193.9,484.25 r90 top
U5 "IS42S32800G-6BLI" BGA-90_L13.0-W8.0-R6-C15-P0.80-TL 940.94,1637.8 r0 top
U6 "KLM8G1GETF-B041006" FBGA-153_L13.0-W11.5-P0.50_KLMAG1JETD-B041 248.03,1059.06 r180 top
U9 "AP6212" QFN-44_L12.0-W12.0-P0.90-TL 893.97,2224.82 r0 top
U15_U_Audio-HiFi1 "LMH6624MF/NOPB" DBV0005A_L 1020.24,978.31 r0 top (schematic designator U15)
U15_U_Audio-HiFi2 "LMH6624MF/NOPB" DBV0005A_L 660.94,975.71 r0 top (schematic designator U15)
U16_U_Audio-HiFi1 "AD8066ARZ-R7" DFN-8_L3.0-W3.0-P0.50-BL-EP 1020.45,613.36 r270 top (schematic designator U16)
U16_U_Audio-HiFi2 "AD8066ARZ-R7" DFN-8_L3.0-W3.0-P0.50-BL-EP 661.16,610.76 r270 top (schematic designator U16)
USBC1 "USB Type C -16P" USB-C-SMD_16P 354.33,177.17 r180 top
X2 "25M" XTAL-3225-4P 594.49,1228.35 r90 top
X3 "26M" XTAL-3225-4P 1684.8,191.57 r0 top

## Footprints (in the part's own frame and the unit in brackets; to place one, negate y for a bottom-side part, rotate by r counter-clockwise, add the part's x,y. Pads: shape width x height; smd on the part's side, far side on the other; paste and mask are expansions set on the pad)
2.4GANTS9 [mm] "淘宝ID:黄晶宝石"
  round 0.5 smd: 1(0,0)
  Top Layer lines w0.5: 0,0 0,5 1,5 1,2.5 2,2.5 2,4.96 ; 2,5 3,5 3,2.5 4,2.5 4,4.99 ; 4,5 5,5 5,2.5 6,2.5 6,5 11,5
0402-C [mil]
  rrect50% 20x20 smd: 1(-20,0) 2(20,0)
  silkscreen extent -6,-9 6,9, body extent -20,-10 20,10, height 20
0402-R [mil]
  rrect50% 20x20 smd: 1(-20,0) 2(20,0)
  silkscreen extent -6,-10 7,10, body extent -20,-10 20,10, height 14
0603-R [mil] "1/10W贴片电阻"
  rect 30x30 smd: 1(-25.59,0) 2(25.59,0)
  body extent -31,-16 31,16, height 16
BGA-90_L13.0-W8.0-R6-C15-P0.80-TL [mm]
  round 0.45 smd: A1(-3.2,5.6) A2(-2.4,5.6) A3(-1.6,5.6) A7(1.6,5.6) A8(2.4,5.6) A9(3.2,5.6) B1(-3.2,4.8) B2(-2.4,4.8) B3(-1.6,4.8) B7(1.6,4.8) B8(2.4,4.8) B9(3.2,4.8) C1(-3.2,4) C2(-2.4,4) C3(-1.6,4) C7(1.6,4) C8(2.4,4) C9(3.2,4) D1(-3.2,3.2) D2(-2.4,3.2) D3(-1.6,3.2) D7(1.6,3.2) D8(2.4,3.2) D9(3.2,3.2) E1(-3.2,2.4) E2(-2.4,2.4) E3(-1.6,2.4) E7(1.6,2.4) E8(2.4,2.4) E9(3.2,2.4) F1(-3.2,1.6) F2(-2.4,1.6) F3(-1.6,1.6) F7(1.6,1.6) F8(2.4,1.6) F9(3.2,1.6) G1(-3.2,0.8) G2(-2.4,0.8) G3(-1.6,0.8) G7(1.6,0.8) G8(2.4,0.8) G9(3.2,0.8) H1(-3.2,0) H2(-2.4,0) H3(-1.6,0) H7(1.6,0) H8(2.4,0) H9(3.2,0) J1(-3.2,-0.8) J2(-2.4,-0.8) J3(-1.6,-0.8) J7(1.6,-0.8) J8(2.4,-0.8) J9(3.2,-0.8) K1(-3.2,-1.6) K2(-2.4,-1.6) K3(-1.6,-1.6) K7(1.6,-1.6) K8(2.4,-1.6) K9(3.2,-1.6) L1(-3.2,-2.4) L2(-2.4,-2.4) L3(-1.6,-2.4) L7(1.6,-2.4) L8(2.4,-2.4) L9(3.2,-2.4) M1(-3.2,-3.2) M2(-2.4,-3.2) M3(-1.6,-3.2) M7(1.6,-3.2) M8(2.4,-3.2) M9(3.2,-3.2) N1(-3.2,-4) N2(-2.4,-4) N3(-1.6,-4) N7(1.6,-4) N8(2.4,-4) N9(3.2,-4) P1(-3.2,-4.8) P2(-2.4,-4.8) P3(-1.6,-4.8) P7(1.6,-4.8) P8(2.4,-4.8) P9(3.2,-4.8) R1(-3.2,-5.6) R2(-2.4,-5.6) R3(-1.6,-5.6) R7(1.6,-5.6) R8(2.4,-5.6) R9(3.2,-5.6)
  silkscreen extent -4.74,-6.5 4,6.56, body extent -4,-6.5 4,6.5, height 0.9
BM25-4S/2-V-51 [mm] "Battery Connector"
  rect 0.7x0.6 smd: 1(-0.833,-1.185) 2(-0.833,1.185) 7(0.818,-1.185) 8(0.818,1.185)
  rect 0.25x0.6 smd: 3(-0.175,-1.185) 4(-0.175,1.185) 5(0.206,-1.185) 6(0.206,1.185)
  rect 1.25x0.6 smd: 9(-1.881,-1.185) 10(-1.881,1.185) 11(1.881,-1.185) 12(1.881,1.185)
  rect 0.35x0.65 smd: 13(-2.331,-0.423) 14(-2.331,0.395) 15(2.331,-0.399) 16(2.331,0.395)
  body extent -2.5,-1.3 2.5,1.3, height 0.7
DBV0005A_L [mm] "SOT23, 5-Leads, Body 3.05x1.75mm, Pitch 0.95mm, IPC High Density"
  rrect18% 0.8x0.55 smd: 1(-1.275,0.95) 2(-1.275,0) 3(-1.275,-0.95) 4(1.275,-0.95) 5(1.275,0.95)
  silkscreen extent -1.4,-1.55 0.5,1.9, body extent -1.42,-1.46 1.42,1.46, height 1.08
DFN-8_L3.0-W3.0-P0.50-BL-EP [mm]
  rect 0.28x0.665 smd paste+0.051: 1(-0.75,-1.407) 2(-0.25,-1.407) 3(0.25,-1.407) 4(0.75,-1.407) 5(0.75,1.407) 6(0.25,1.407) 7(-0.25,1.407) 8(-0.75,1.407)
  rect 2.45x1.65 smd paste+0.051: 9(0,0)
  silkscreen extent -1.58,-1.93 1.58,1.58, body extent -1.5,-1.51 1.5,1.51, height 1.02
FBGA-153_L13.0-W11.5-P0.50_KLMAG1JETD-B041 [mm]
  round 0.25 smd paste-100 mask+0.05: A1(-3.25,3.25) A2(-2.75,3.25) A3(-2.25,3.25) A4(-1.75,3.25) A5(-1.25,3.25) A6(-0.75,3.25) A7(-0.25,3.25) A8(0.25,3.25) A9(0.75,3.25) A10(1.25,3.25) A11(1.75,3.25) A12(2.25,3.25) A13(2.75,3.25) A14(3.25,3.25) B1(-3.25,2.75) B2(-2.75,2.75) B3(-2.25,2.75) B4(-1.75,2.75) B5(-1.25,2.75) B6(-0.75,2.75) B7(-0.25,2.75) B8(0.25,2.75) B9(0.75,2.75) B10(1.25,2.75) B11(1.75,2.75) B12(2.25,2.75) B13(2.75,2.75) B14(3.25,2.75) C1(-3.25,2.25) C2(-2.75,2.25) C3(-2.25,2.25) C4(-1.75,2.25) C5(-1.25,2.25) C6(-0.75,2.25) C7(-0.25,2.25) C8(0.25,2.25) C9(0.75,2.25) C10(1.25,2.25) C11(1.75,2.25) C12(2.25,2.25) C13(2.75,2.25) C14(3.25,2.25) D1(-3.25,1.75) D2(-2.75,1.75) D3(-2.25,1.75) D4(-1.75,1.75) D12(2.25,1.75) D13(2.75,1.75) D14(3.25,1.75) E1(-3.25,1.25) E2(-2.75,1.25) E3(-2.25,1.25) E5(-1.25,1.25) E6(-0.75,1.25) E7(-0.25,1.25) E8(0.25,1.25) E9(0.75,1.25) E10(1.25,1.25) E12(2.25,1.25) E13(2.75,1.25) E14(3.25,1.25) F1(-3.25,0.75) F2(-2.75,0.75) F3(-2.25,0.75) F5(-1.25,0.75) F10(1.25,0.75) F12(2.25,0.75) F13(2.75,0.75) F14(3.25,0.75) G1(-3.25,0.25) G2(-2.75,0.25) G3(-2.25,0.25) G5(-1.25,0.25) G10(1.25,0.25) G12(2.25,0.25) G13(2.75,0.25) G14(3.25,0.25) H1(-3.25,-0.25) H2(-2.75,-0.25) H3(-2.25,-0.25) H5(-1.25,-0.25) H10(1.25,-0.25) H12(2.25,-0.25) H13(2.75,-0.25) H14(3.25,-0.25) J1(-3.25,-0.75) J2(-2.75,-0.75) J3(-2.25,-0.75) J5(-1.25,-0.75) J10(1.25,-0.75) J12(2.25,-0.75) J13(2.75,-0.75) J14(3.25,-0.75) K1(-3.25,-1.25) K2(-2.75,-1.25) K3(-2.25,-1.25) K5(-1.25,-1.25) K6(-0.75,-1.25) K7(-0.25,-1.25) K8(0.25,-1.25) K9(0.75,-1.25) K10(1.25,-1.25) K12(2.25,-1.25) K13(2.75,-1.25) K14(3.25,-1.25) L1(-3.25,-1.75) L2(-2.75,-1.75) L3(-2.25,-1.75) L12(2.25,-1.75) L13(2.75,-1.75) L14(3.25,-1.75) M1(-3.25,-2.25) M2(-2.75,-2.25) M3(-2.25,-2.25) M4(-1.75,-2.25) M5(-1.25,-2.25) M6(-0.75,-2.25) M7(-0.25,-2.25) M8(0.25,-2.25) M9(0.75,-2.25) M10(1.25,-2.25) M11(1.75,-2.25) M12(2.25,-2.25) M13(2.75,-2.25) M14(3.25,-2.25) N1(-3.25,-2.75) N2(-2.75,-2.75) N3(-2.25,-2.75) N4(-1.75,-2.75) N5(-1.25,-2.75) N6(-0.75,-2.75) N7(-0.25,-2.75) N8(0.25,-2.75) N9(0.75,-2.75) N10(1.25,-2.75) N11(1.75,-2.75) N12(2.25,-2.75) N13(2.75,-2.75) N14(3.25,-2.75) P1(-3.25,-3.25) P2(-2.75,-3.25) P3(-2.25,-3.25) P4(-1.75,-3.25) P5(-1.25,-3.25) P6(-0.75,-3.25) P7(-0.25,-3.25) P8(0.25,-3.25) P9(0.75,-3.25) P10(1.25,-3.25) P11(1.75,-3.25) P12(2.25,-3.25) P13(2.75,-3.25) P14(3.25,-3.25)
  silkscreen extent -6.22,-6.61 5.84,6.86, body extent -5.75,-6.5 5.75,6.5, height 0.89
FP-DPD0012A-MFG [mm]
  rrect100% 0.6x0.2 smd paste+0 mask+0: 1(-1.4,1.125) 2(-1.4,0.675) 3(-1.4,0.225) 4(-1.4,-0.225) 5(-1.4,-0.675) 6(-1.4,-1.125) 7(1.4,-1.125) 8(1.4,-0.675) 9(1.4,-0.225) 10(1.4,0.225) 11(1.4,0.675) 12(1.4,1.125)
  rect 1.21x2.02 smd paste-1000 mask+0: 13(0,0)
  silkscreen extent -2.4,-1.6 1.5,1.6, body extent -1.8,-1.65 1.8,1.65, height 0.25
FP-NFM18-0_1-e0_05_0_35-MFG [mm]
  round 0.36 smd paste+0 mask+0: 1(-0.8,0) 2(0,0.4) 2(0,-0.4) 3(0.8,0)
  Top Layer region: -1,-0.2 -1,0.2 -0.65,0.2 -0.6,0.15 -0.6,-0.15 -0.65,-0.2 -1,-0.2
  Top Layer region: -0.4,-0.6 0.4,-0.6 0.4,-0.25 0.35,-0.2 -0.35,-0.2 -0.4,-0.25 -0.4,-0.6
  Top Layer region: -0.4,0.6 0.4,0.6 0.4,0.25 0.35,0.2 -0.35,0.2 -0.4,0.25 -0.4,0.6
  Top Layer region: 1,-0.2 1,0.2 0.65,0.2 0.6,0.15 0.6,-0.15 0.65,-0.2 1,-0.2
  silkscreen extent -1.68,-0.12 -1.43,0.12, body extent -1.1,-0.7 1.1,0.7, height 0.25
FP-RSL0048A-MFG [mm] "QFN, 16-Leads, Body 3x3mm, Pitch 0.5mm, Thermal Pad 1.3x1.3mm, IPC Low Density"
  round 0.18 smd paste+0 mask+0: 1(-2.975,2.2) 2(-2.985,1.8) 3(-2.985,1.4) 4(-2.985,1) 5(-2.985,0.6) 6(-2.985,0.2) 7(-3.3,-0.2) 8(-2.975,-0.6) 9(-3.3,-1) 10(-2.975,-1.4) 11(-2.975,-1.8) 12(-2.975,-2.2) 13(-2.2,-2.975) 14(-1.8,-2.975) 15(-1.4,-2.985) 16(-1,-2.975) 17(-0.6,-2.985) 18(-0.2,-2.985) 19(0.2,-2.975) 20(0.6,-2.975) 21(1,-2.975) 22(1.4,-2.975) 23(1.8,-3.3) 24(2.2,-2.975) 25(2.975,-2.2) 26(2.975,-1.8) 27(2.975,-1.4) 28(2.975,-1) 29(2.985,-0.6) 30(2.975,-0.2) 31(3.25,0.2) 32(3.25,0.6) 33(2.975,1) 34(3.25,1.4) 35(2.975,1.8) 36(3.25,2.2) 37(2.2,2.975) 38(1.8,2.975) 39(1.4,2.975) 40(1,2.975) 41(0.6,2.975) 42(0.2,2.975) 43(-0.2,2.975) 44(-0.6,2.975) 45(-1,2.975) 46(-1.4,2.975) 47(-1.8,2.975) 48(-2.2,2.975)
  rect 4.05x4.05 smd paste-1000 mask+0: 49(-0.225,0.225)
  Top Layer region: 3.4,-0.3 2.65,-0.3 2.612,-0.292 2.579,-0.271 2.558,-0.238 2.55,-0.2 2.55,-0.2 2.558,-0.162 2.579,-0.129 2.612,-0.108 2.65,-0.1 2.65,-0.1 3.4,-0.1
  Top Layer region: 0.7,3.4 0.7,2.65 0.692,2.612 0.671,2.579 0.638,2.558 0.6,2.55 0.6,2.55 0.562,2.558 0.529,2.579 0.508,2.612 0.5,2.65 0.5,2.65 0.5,3.4
  Top Layer region: -0.1,3.4 -0.1,2.65 -0.113,2.6 -0.15,2.563 -0.2,2.55 -0.2,2.55 -0.238,2.558 -0.271,2.579 -0.292,2.612 -0.3,2.65 -0.3,2.65 -0.3,3.4
  Top Layer region: -0.3,-3.4 -0.3,-2.65 -0.292,-2.612 -0.271,-2.579 -0.238,-2.558 -0.2,-2.55 -0.2,-2.55 -0.162,-2.558 -0.129,-2.579 -0.108,-2.612 -0.1,-2.65 -0.1,-2.65 -0.1,-3.4
  Top Layer region: -3.4,2.3 -2.65,2.3 -2.612,2.292 -2.579,2.271 -2.558,2.238 -2.55,2.2 -2.55,2.2 -2.563,2.15 -2.6,2.113 -2.65,2.1 -2.65,2.1 -3.4,2.1
  Top Layer region: -3.4,1.9 -2.65,1.9 -2.612,1.892 -2.579,1.871 -2.558,1.838 -2.55,1.8 -2.55,1.8 -2.563,1.75 -2.6,1.713 -2.65,1.7 -2.65,1.7 -3.4,1.7
  Top Layer region: -3.4,1.5 -2.65,1.5 -2.612,1.492 -2.579,1.471 -2.558,1.438 -2.55,1.4 -2.55,1.4 -2.558,1.362 -2.579,1.329 -2.612,1.308 -2.65,1.3 -2.65,1.3 -3.4,1.3
  Top Layer region: -3.4,1.1 -2.65,1.1 -2.612,1.092 -2.579,1.071 -2.558,1.038 -2.55,1 -2.55,1 -2.558,0.962 -2.579,0.929 -2.612,0.908 -2.65,0.9 -2.65,0.9 -3.4,0.9
  Top Layer region: -3.4,0.7 -2.65,0.7 -2.612,0.692 -2.579,0.671 -2.558,0.638 -2.55,0.6 -2.55,0.6 -2.558,0.562 -2.579,0.529 -2.612,0.508 -2.65,0.5 -2.65,0.5 -3.4,0.5
  Top Layer region: -3.4,0.3 -2.65,0.3 -2.612,0.292 -2.579,0.271 -2.558,0.238 -2.55,0.2 -2.55,0.2 -2.558,0.162 -2.579,0.129 -2.612,0.108 -2.65,0.1 -2.65,0.1 -3.4,0.1
  Top Layer region: -3.4,-0.1 -2.65,-0.1 -2.612,-0.108 -2.579,-0.129 -2.558,-0.162 -2.55,-0.2 -2.55,-0.2 -2.558,-0.238 -2.579,-0.271 -2.612,-0.292 -2.65,-0.3 -2.65,-0.3 -3.4,-0.3
  Top Layer region: -3.4,-0.5 -2.65,-0.5 -2.612,-0.508 -2.579,-0.529 -2.558,-0.562 -2.55,-0.6 -2.55,-0.6 -2.558,-0.638 -2.579,-0.671 -2.612,-0.692 -2.65,-0.7 -2.65,-0.7 -3.4,-0.7
  Top Layer region: -3.4,-0.9 -2.65,-0.9 -2.612,-0.908 -2.579,-0.929 -2.558,-0.962 -2.55,-1 -2.55,-1 -2.558,-1.038 -2.579,-1.071 -2.612,-1.092 -2.65,-1.1 -2.65,-1.1 -3.4,-1.1
  Top Layer region: -3.4,-1.3 -2.65,-1.3 -2.612,-1.308 -2.579,-1.329 -2.558,-1.362 -2.55,-1.4 -2.55,-1.4 -2.563,-1.45 -2.6,-1.487 -2.65,-1.5 -2.65,-1.5 -3.4,-1.5
  Top Layer region: -3.4,-1.7 -2.65,-1.7 -2.612,-1.708 -2.579,-1.729 -2.558,-1.762 -2.55,-1.8 -2.55,-1.8 -2.563,-1.85 -2.6,-1.887 -2.65,-1.9 -2.65,-1.9 -3.4,-1.9
  Top Layer region: -3.4,-2.1 -2.65,-2.1 -2.612,-2.108 -2.579,-2.129 -2.558,-2.162 -2.55,-2.2 -2.55,-2.2 -2.563,-2.25 -2.6,-2.287 -2.65,-2.3 -2.65,-2.3 -3.4,-2.3
  Top Layer region: -2.3,-3.4 -2.3,-2.65 -2.292,-2.612 -2.271,-2.579 -2.238,-2.558 -2.2,-2.55 -2.2,-2.55 -2.162,-2.558 -2.129,-2.579 -2.108,-2.612 -2.1,-2.65 -2.1,-2.65 -2.1,-3.4
  Top Layer region: -1.9,-3.4 -1.9,-2.65 -1.892,-2.612 -1.871,-2.579 -1.838,-2.558 -1.8,-2.55 -1.8,-2.55 -1.762,-2.558 -1.729,-2.579 -1.708,-2.612 -1.7,-2.65 -1.7,-2.65 -1.7,-3.4
  Top Layer region: -1.5,-3.4 -1.5,-2.65 -1.492,-2.612 -1.471,-2.579 -1.438,-2.558 -1.4,-2.55 -1.4,-2.55 -1.362,-2.558 -1.329,-2.579 -1.308,-2.612 -1.3,-2.65 -1.3,-2.65 -1.3,-3.4
  Top Layer region: -1.1,-3.4 -1.1,-2.65 -1.092,-2.612 -1.071,-2.579 -1.038,-2.558 -1,-2.55 -1,-2.55 -0.962,-2.558 -0.929,-2.579 -0.908,-2.612 -0.9,-2.65 -0.9,-2.65 -0.9,-3.4
  Top Layer region: -0.7,-3.4 -0.7,-2.65 -0.692,-2.612 -0.671,-2.579 -0.638,-2.558 -0.6,-2.55 -0.6,-2.55 -0.562,-2.558 -0.529,-2.579 -0.508,-2.612 -0.5,-2.65 -0.5,-2.65 -0.5,-3.4
  Top Layer region: 0.1,-3.4 0.1,-2.65 0.108,-2.612 0.129,-2.579 0.162,-2.558 0.2,-2.55 0.2,-2.55 0.238,-2.558 0.271,-2.579 0.292,-2.612 0.3,-2.65 0.3,-2.65 0.3,-3.4
  Top Layer region: 0.5,-3.4 0.5,-2.65 0.508,-2.612 0.529,-2.579 0.562,-2.558 0.6,-2.55 0.6,-2.55 0.638,-2.558 0.671,-2.579 0.692,-2.612 0.7,-2.65 0.7,-2.65 0.7,-3.4
  Top Layer region: 0.9,-3.4 0.9,-2.65 0.908,-2.612 0.929,-2.579 0.962,-2.558 1,-2.55 1,-2.55 1.038,-2.558 1.071,-2.579 1.092,-2.612 1.1,-2.65 1.1,-2.65 1.1,-3.4
  Top Layer region: 1.3,-3.4 1.3,-2.65 1.308,-2.612 1.329,-2.579 1.362,-2.558 1.4,-2.55 1.4,-2.55 1.438,-2.558 1.471,-2.579 1.492,-2.612 1.5,-2.65 1.5,-2.65 1.5,-3.4
  Top Layer region: 1.7,-3.4 1.7,-2.65 1.708,-2.612 1.729,-2.579 1.762,-2.558 1.8,-2.55 1.8,-2.55 1.838,-2.558 1.871,-2.579 1.892,-2.612 1.9,-2.65 1.9,-2.65 1.9,-3.4
  Top Layer region: 2.1,-3.4 2.1,-2.65 2.108,-2.612 2.129,-2.579 2.162,-2.558 2.2,-2.55 2.2,-2.55 2.238,-2.558 2.271,-2.579 2.292,-2.612 2.3,-2.65 2.3,-2.65 2.3,-3.4
  Top Layer region: 3.4,-2.3 2.65,-2.3 2.612,-2.292 2.579,-2.271 2.558,-2.238 2.55,-2.2 2.55,-2.2 2.558,-2.162 2.579,-2.129 2.612,-2.108 2.65,-2.1 2.65,-2.1 3.4,-2.1
  Top Layer region: 3.4,-1.9 2.65,-1.9 2.612,-1.892 2.579,-1.871 2.558,-1.838 2.55,-1.8 2.55,-1.8 2.558,-1.762 2.579,-1.729 2.612,-1.708 2.65,-1.7 2.65,-1.7 3.4,-1.7
  Top Layer region: 3.4,-1.5 2.65,-1.5 2.612,-1.492 2.579,-1.471 2.558,-1.438 2.55,-1.4 2.55,-1.4 2.558,-1.362 2.579,-1.329 2.612,-1.308 2.65,-1.3 2.65,-1.3 3.4,-1.3
  Top Layer region: 3.4,-1.1 2.65,-1.1 2.612,-1.092 2.579,-1.071 2.558,-1.038 2.55,-1 2.55,-1 2.558,-0.962 2.579,-0.929 2.612,-0.908 2.65,-0.9 2.65,-0.9 3.4,-0.9
  Top Layer region: 3.4,-0.7 2.65,-0.7 2.612,-0.692 2.579,-0.671 2.558,-0.638 2.55,-0.6 2.55,-0.6 2.558,-0.562 2.579,-0.529 2.612,-0.508 2.65,-0.5 2.65,-0.5 3.4,-0.5
  Top Layer region: 3.4,0.1 2.65,0.1 2.612,0.108 2.579,0.129 2.558,0.162 2.55,0.2 2.55,0.2 2.558,0.238 2.579,0.271 2.612,0.292 2.65,0.3 2.65,0.3 3.4,0.3
  Top Layer region: 3.4,0.5 2.65,0.5 2.612,0.508 2.579,0.529 2.558,0.562 2.55,0.6 2.55,0.6 2.558,0.638 2.579,0.671 2.612,0.692 2.65,0.7 2.65,0.7 3.4,0.7
  Top Layer region: 3.4,0.9 2.65,0.9 2.612,0.908 2.579,0.929 2.558,0.962 2.55,1 2.55,1 2.558,1.038 2.579,1.071 2.612,1.092 2.65,1.1 2.65,1.1 3.4,1.1
  Top Layer region: 3.4,1.3 2.65,1.3 2.612,1.308 2.579,1.329 2.558,1.362 2.55,1.4 2.55,1.4 2.558,1.438 2.579,1.471 2.612,1.492 2.65,1.5 2.65,1.5 3.4,1.5
  Top Layer region: 3.4,1.7 2.65,1.7 2.612,1.708 2.579,1.729 2.558,1.762 2.55,1.8 2.55,1.8 2.558,1.838 2.579,1.871 2.612,1.892 2.65,1.9 2.65,1.9 3.4,1.9
  Top Layer region: 3.4,2.1 2.65,2.1 2.612,2.108 2.579,2.129 2.558,2.162 2.55,2.2 2.55,2.2 2.558,2.238 2.579,2.271 2.612,2.292 2.65,2.3 2.65,2.3 3.4,2.3
  Top Layer region: 2.3,3.4 2.3,2.65 2.287,2.6 2.25,2.563 2.2,2.55 2.2,2.55 2.162,2.558 2.129,2.579 2.108,2.612 2.1,2.65 2.1,2.65 2.1,3.4
  Top Layer region: 1.9,3.4 1.9,2.65 1.892,2.612 1.871,2.579 1.838,2.558 1.8,2.55 1.8,2.55 1.762,2.558 1.729,2.579 1.708,2.612 1.7,2.65 1.7,2.65 1.7,3.4
  Top Layer region: 1.5,3.4 1.5,2.65 1.492,2.612 1.471,2.579 1.438,2.558 1.4,2.55 1.4,2.55 1.362,2.558 1.329,2.579 1.308,2.612 1.3,2.65 1.3,2.65 1.3,3.4
  Top Layer region: 1.1,3.4 1.1,2.65 1.092,2.612 1.071,2.579 1.038,2.558 1,2.55 1,2.55 0.962,2.558 0.929,2.579 0.908,2.612 0.9,2.65 0.9,2.65 0.9,3.4
  Top Layer region: 0.3,3.4 0.3,2.65 0.292,2.612 0.271,2.579 0.238,2.558 0.2,2.55 0.2,2.55 0.162,2.558 0.129,2.579 0.108,2.612 0.1,2.65 0.1,2.65 0.1,3.4
  Top Layer region: -0.5,3.4 -0.5,2.65 -0.508,2.612 -0.529,2.579 -0.562,2.558 -0.6,2.55 -0.6,2.55 -0.638,2.558 -0.671,2.579 -0.692,2.612 -0.7,2.65 -0.7,2.65 -0.7,3.4
  Top Layer region: -0.9,3.4 -0.9,2.65 -0.908,2.612 -0.929,2.579 -0.962,2.558 -1,2.55 -1,2.55 -1.038,2.558 -1.071,2.579 -1.092,2.612 -1.1,2.65 -1.1,2.65 -1.1,3.4
  Top Layer region: -1.3,3.4 -1.3,2.65 -1.313,2.6 -1.35,2.563 -1.4,2.55 -1.4,2.55 -1.438,2.558 -1.471,2.579 -1.492,2.612 -1.5,2.65 -1.5,2.65 -1.5,3.4
  Top Layer region: -1.7,3.4 -1.7,2.65 -1.708,2.612 -1.729,2.579 -1.762,2.558 -1.8,2.55 -1.8,2.55 -1.838,2.558 -1.871,2.579 -1.892,2.612 -1.9,2.65 -1.9,2.65 -1.9,3.4
  Top Layer region: -2.1,3.4 -2.1,2.65 -2.113,2.6 -2.15,2.563 -2.2,2.55 -2.2,2.55 -2.238,2.558 -2.271,2.579 -2.292,2.612 -2.3,2.65 -2.3,2.65 -2.3,3.4
  silkscreen extent -4.1,-3.08 3.08,3.08, body extent -3.5,-3.5 3.5,3.5, height 0.25
FP-TFBGA240+25-A07U-MFG [mm]
  round 0.225 smd paste-1000 mask+0: A1(-6.4,6.4) A2(-5.6,6.4) A3(-4.8,6.4) A4(-4,6.4) A5(-3.2,6.4) A6(-2.4,6.4) A7(-1.6,6.4) A8(-0.8,6.4) A9(0,6.4) A10(0.8,6.4) A11(1.6,6.4) A12(2.4,6.4) A13(3.2,6.4) A14(4,6.4) A15(4.8,6.4) A16(5.6,6.4) A17(6.4,6.4) B1(-6.4,5.6) B2(-5.6,5.6) B3(-4.8,5.6) B4(-4,5.6) B5(-3.2,5.6) B6(-2.4,5.6) B7(-1.6,5.6) B8(-0.8,5.6) B9(0,5.6) B10(0.8,5.6) B11(1.6,5.6) B12(2.4,5.6) B13(3.2,5.6) B14(4,5.6) B15(4.8,5.6) B16(5.6,5.6) B17(6.4,5.6) C1(-6.4,4.8) C2(-5.6,4.8) C3(-4.8,4.8) C4(-4,4.8) C5(-3.2,4.8) C6(-2.4,4.8) C7(-1.6,4.8) C8(-0.8,4.8) C9(0,4.8) C10(0.8,4.8) C11(1.6,4.8) C12(2.4,4.8) C13(3.2,4.8) C14(4,4.8) C15(4.8,4.8) C16(5.6,4.8) C17(6.4,4.8) D1(-6.4,4) D2(-5.6,4) D3(-4.8,4) D4(-4,4) D5(-3.2,4) D6(-2.4,4) D7(-1.6,4) D8(-0.8,4) D9(0,4) D10(0.8,4) D11(1.6,4) D12(2.4,4) D13(3.2,4) D14(4,4) D15(4.8,4) D16(5.6,4) D17(6.4,4) E1(-6.4,3.2) E2(-5.6,3.2) E3(-4.8,3.2) E4(-4,3.2) E5(-3.2,3.2) E6(-2.4,3.2) E7(-1.6,3.2) E8(-0.8,3.2) E9(0,3.2) E10(0.8,3.2) E11(1.6,3.2) E12(2.4,3.2) E13(3.2,3.2) E14(4,3.2) E15(4.8,3.2) E16(5.6,3.2) E17(6.4,3.2) F1(-6.4,2.4) F2(-5.6,2.4) F3(-4.8,2.4) F4(-4,2.4) F5(-3.2,2.4) F13(3.2,2.4) F14(4,2.4) F15(4.8,2.4) F16(5.6,2.4) F17(6.4,2.4) G1(-6.4,1.6) G2(-5.6,1.6) G3(-4.8,1.6) G4(-4,1.6) G5(-3.2,1.6) G7(-1.6,1.6) G8(-0.8,1.6) G9(0,1.6) G10(0.8,1.6) G11(1.6,1.6) G13(3.2,1.6) G14(4,1.6) G15(4.8,1.6) G16(5.6,1.6) G17(6.4,1.6) H1(-6.4,0.8) H2(-5.6,0.8) H3(-4.8,0.8) H4(-4,0.8) H5(-3.2,0.8) H7(-1.6,0.8) H8(-0.8,0.8) H9(0,0.8) H10(0.8,0.8) H11(1.6,0.8) H13(3.2,0.8) H14(4,0.8) H15(4.8,0.8) H16(5.6,0.8) H17(6.4,0.8) J1(-6.4,0) J2(-5.6,0) J3(-4.8,0) J4(-4,0) J5(-3.2,0) J7(-1.6,0) J8(-0.8,0) J9(0,0) J10(0.8,0) J11(1.6,0) J13(3.2,0) J14(4,0) J15(4.8,0) J16(5.6,0) J17(6.4,0) K1(-6.4,-0.8) K2(-5.6,-0.8) K3(-4.8,-0.8) K4(-4,-0.8) K5(-3.2,-0.8) K7(-1.6,-0.8) K8(-0.8,-0.8) K9(0,-0.8) K10(0.8,-0.8) K11(1.6,-0.8) K13(3.2,-0.8) K14(4,-0.8) K15(4.8,-0.8) K16(5.6,-0.8) K17(6.4,-0.8) L1(-6.4,-1.6) L2(-5.6,-1.6) L3(-4.8,-1.6) L4(-4,-1.6) L5(-3.2,-1.6) L7(-1.6,-1.6) L8(-0.8,-1.6) L9(0,-1.6) L10(0.8,-1.6) L11(1.6,-1.6) L13(3.2,-1.6) L14(4,-1.6) L15(4.8,-1.6) L16(5.6,-1.6) L17(6.4,-1.6) M1(-6.4,-2.4) M2(-5.6,-2.4) M3(-4.8,-2.4) M4(-4,-2.4) M5(-3.2,-2.4) M13(3.2,-2.4) M14(4,-2.4) M15(4.8,-2.4) M16(5.6,-2.4) M17(6.4,-2.4) N1(-6.4,-3.2) N2(-5.6,-3.2) N3(-4.8,-3.2) N4(-4,-3.2) N5(-3.2,-3.2) N6(-2.4,-3.2) N7(-1.6,-3.2) N8(-0.8,-3.2) N9(0,-3.2) N10(0.8,-3.2) N11(1.6,-3.2) N12(2.4,-3.2) N13(3.2,-3.2) N14(4,-3.2) N15(4.8,-3.2) N16(5.6,-3.2) N17(6.4,-3.2) P1(-6.4,-4) P2(-5.6,-4) P3(-4.8,-4) P4(-4,-4) P5(-3.2,-4) P6(-2.4,-4) P7(-1.6,-4) P8(-0.8,-4) P9(0,-4) P10(0.8,-4) P11(1.6,-4) P12(2.4,-4) P13(3.2,-4) P14(4,-4) P15(4.8,-4) P16(5.6,-4) P17(6.4,-4) R1(-6.4,-4.8) R2(-5.6,-4.8) R3(-4.8,-4.8) R4(-4,-4.8) R5(-3.2,-4.8) R6(-2.4,-4.8) R7(-1.6,-4.8) R8(-0.8,-4.8) R9(0,-4.8) R10(0.8,-4.8) R11(1.6,-4.8) R12(2.4,-4.8) R13(3.2,-4.8) R14(4,-4.8) R15(4.8,-4.8) R16(5.6,-4.8) R17(6.4,-4.8) T1(-6.4,-5.6) T2(-5.6,-5.6) T3(-4.8,-5.6) T4(-4,-5.6) T5(-3.2,-5.6) T6(-2.4,-5.6) T7(-1.6,-5.6) T8(-0.8,-5.6) T9(0,-5.6) T10(0.8,-5.6) T11(1.6,-5.6) T12(2.4,-5.6) T13(3.2,-5.6) T14(4,-5.6) T15(4.8,-5.6) T16(5.6,-5.6) T17(6.4,-5.6) U1(-6.4,-6.4) U2(-5.6,-6.4) U3(-4.8,-6.4) U4(-4,-6.4) U5(-3.2,-6.4) U6(-2.4,-6.4) U7(-1.6,-6.4) U8(-0.8,-6.4) U9(0,-6.4) U10(0.8,-6.4) U11(1.6,-6.4) U12(2.4,-6.4) U13(3.2,-6.4) U14(4,-6.4) U15(4.8,-6.4) U16(5.6,-6.4) U17(6.4,-6.4)
  silkscreen extent -7.57,-7.07 7.07,7.07, body extent -7.57,-7.57 7.57,7.57, height 0.25
FPC0.5-WT-24P [mm] "长：16.2mm，宽：5.2mm，高：2mm 淘宝ID:黄晶宝石   店铺网址:https://shop463601444.taobao.com"
  rect 1.8x2.2 smd: 0(-7.4,0) 0(7.4,0)
  rect 0.3x1.3 smd: 1(-5.75,2.497) 2(-5.25,2.497) 3(-4.75,2.497) 4(-4.25,2.497) 5(-3.75,2.497) 6(-3.25,2.497) 7(-2.75,2.497) 8(-2.25,2.497) 9(-1.75,2.497) 10(-1.25,2.497) 11(-0.75,2.497) 12(-0.25,2.497) 13(0.25,2.497) 14(0.75,2.497) 15(1.25,2.497) 16(1.75,2.497) 17(2.25,2.497) 18(2.75,2.497) 19(3.25,2.497) 20(3.75,2.497) 21(4.25,2.497) 22(4.75,2.497) 23(5.25,2.497) 24(5.75,2.497)
  silkscreen extent -8.18,-3.3 8.18,3.23, body extent -8.1,-3.15 8.1,2.85, height 2
L0603 [mil]
  rect 29.5x32 smd: 1(-31.5,0) 2(31.5,0)
  silkscreen extent -55,-25 55,25, body extent -31,-15 32,16, height 16
L0805 [mm] "0805贴片叠层电感"
  rect 1x1.3 smd: 1(-0.95,0) 2(0.95,0)
  silkscreen extent -1.7,-0.89 1.7,0.89, body extent -1,-0.65 1,0.65, height 1.3
PJ342A [mm] "沉板式，有头"
  round 1.5 hole 1.5: 0(0,-4.4) 0(0,-11.5)
  rect 2.3x1.2 smd: 1(-3.81,-4.1) 2(3.556,-4.1) 3(-3.81,-7.5) 4(3.556,-11.3) 5(-3.81,-13) 6(3.556,-13.6)
  silkscreen extent -3.3,-14.22 3.3,0, body extent -4.2,-14.15 4.1,-0.05, height 4.75
"QFN32 5x5_L" [mm] "32脚，长x宽x高：5x5x0.95mm，脚距：0.5mm"
  rect 0.25x0.7 smd: 1(-1.751,-2.4)
  oval 0.25x0.7 smd: 2(-1.25,-2.4) 3(-0.75,-2.4) 4(-0.25,-2.4) 5(0.25,-2.4) 6(0.75,-2.4) 7(1.25,-2.4) 8(1.75,-2.4) 17(1.75,2.4) 18(1.25,2.4) 19(0.75,2.4) 20(0.25,2.4) 21(-0.25,2.4) 22(-0.75,2.4) 23(-1.25,2.4) 24(-1.75,2.4)
  oval 0.7x0.25 smd: 9(2.4,-1.75) 10(2.4,-1.25) 11(2.4,-0.75) 12(2.4,-0.25) 13(2.4,0.25) 14(2.4,0.75) 15(2.4,1.25) 16(2.4,1.75) 25(-2.4,1.75) 26(-2.4,1.25) 27(-2.4,0.75) 28(-2.4,0.25) 29(-2.4,-0.25) 30(-2.4,-0.75) 31(-2.4,-1.25) 32(-2.4,-1.75)
  rect 1x1 smd: 33(0,0)
  Top Layer region: -1.75,1.75 1.75,1.75 1.75,-1.75 -1.25,-1.75 -1.75,-1.25
  silkscreen extent -2.6,-3.13 2.6,2.6, body extent -2.5,-2.5 2.5,2.5, height 1.01
QFN-44_L12.0-W12.0-P0.90-TL [mm]
  rect 1.5x0.6 smd paste+0 mask+0.05: 1(-5.889,4.496) 2(-5.889,3.607) 3(-5.889,2.692) 4(-5.889,1.803) 5(-5.889,0.889) 6(-5.889,0) 7(-5.889,-0.889) 8(-5.889,-1.803) 9(-5.889,-2.692) 10(-5.889,-3.607) 11(-5.889,-4.496) 23(5.889,-4.496) 24(5.889,-3.607) 25(5.889,-2.692) 26(5.889,-1.803) 27(5.889,-0.889) 28(5.889,0) 29(5.889,0.889) 30(5.889,1.803) 31(5.889,2.692) 32(5.889,3.607) 33(5.889,4.496)
  rect 0.6x1.5 smd paste+0 mask+0.05: 12(-4.496,-5.889) 13(-3.607,-5.889) 14(-2.692,-5.889) 15(-1.803,-5.889) 16(-0.889,-5.889) 17(0,-5.889) 18(0.889,-5.889) 19(1.803,-5.889) 20(2.692,-5.889) 21(3.607,-5.889) 22(4.496,-5.889) 34(4.496,5.889) 35(3.607,5.889) 36(2.692,5.889) 37(1.803,5.889) 38(0.889,5.889) 39(0,5.889) 40(-0.889,5.889) 41(-1.803,5.889) 42(-2.692,5.889) 43(-3.607,5.889) 44(-4.496,5.889)
  round 0.6 smd paste+0 mask+0.05: 45(-2.7,3.607) 46(-0.9,3.607) 47(0.9,3.607)
  silkscreen extent -5.99,-5.99 5.99,5.99, body extent -6.01,-6.01 6.01,6.01, height 1.5
SW-SMD-3.5*3.0_4P [mm]
  round 0.8 hole 0.8 unplated mask+0: 0(0,0.9) 0(0,-0.9)
  rect 1x0.7 smd mask+0.051: 1(-2,0.8) 2(-2,-0.8) 3(2,-0.8) 4(2,0.8)
  silkscreen extent -1.75,-1.5 1.75,2.25, body extent -2.3,-1.51 2.3,2.24, height 1.33
SW-SMD_SIQ-02FVS3_1 [mm]
  rect 1.2x1.3 smd paste+0 mask+0.05: 1(5.4,-2.964) 2(5.4,1.136) 5(-5.4,1.136) 6(-5.4,-2.964)
  rect 0.85x1.2 smd rot 135 paste+0 mask+0.05: 3(2.828,5.264)
  rect 0.85x1.2 smd rot 45 paste+0 mask+0.05: 4(-2.828,5.264)
  rect 1.3x1.4 smd paste+0 mask+0.05: A(-4,-5.264) B(4,-5.264) C(1.475,-5.264) S(-1.475,-5.264)
  Keep-Out Layer board cut-out: -2.2,-2.064 -2.2,-1.959 -2.255,-1.755 -2.36,-1.573 -2.509,-1.424 -2.691,-1.319 -2.895,-1.264 -3.105,-1.264 -3.309,-1.319 -3.491,-1.424 -3.64,-1.573 -3.746,-1.755 -3.8,-1.959 -3.8,-2.064 -3.8,-2.17 -3.746,-2.373 -3.64,-2.555 -3.491,-2.704 -3.309,-2.81 -3.105,-2.864 -2.895,-2.864 -2.691,-2.81 -2.509,-2.704 -2.36,-2.555 -2.255,-2.373 -2.2,-2.17 -2.2,-2.064 -2.2,-2.064
  Keep-Out Layer board cut-out: 3.8,-2.064 3.8,-1.959 3.745,-1.755 3.64,-1.573 3.491,-1.424 3.309,-1.319 3.105,-1.264 2.895,-1.264 2.691,-1.319 2.509,-1.424 2.36,-1.573 2.254,-1.755 2.2,-1.959 2.2,-2.064 2.2,-2.17 2.254,-2.373 2.36,-2.555 2.509,-2.704 2.691,-2.81 2.895,-2.864 3.105,-2.864 3.309,-2.81 3.491,-2.704 3.64,-2.555 3.745,-2.373 3.8,-2.17 3.8,-2.064 3.8,-2.064
  Keep-Out Layer circle w0.254: c-3,-2.064 r0.8
  Keep-Out Layer circle w0.025: c-3,-2.064 r0.8
  Keep-Out Layer circle w0.254: c3,-2.064 r0.8
  Keep-Out Layer circle w0.025: c3,-2.064 r0.8
  silkscreen extent -7.25,-4.76 7.25,9.69, body extent -7.18,-5.15 7.21,9.64, height 4
USB-C-SMD_16P [mm] "封装库来自淘宝ID:黄晶宝石"
  oval 1.2x2.3 hole 0.7 slot 1.8 at 90 deg: 0(-4.5,-1.675) 0(4.5,-1.675)
  oval 1.2x2 hole 0.8 slot 1.6 at 90 deg: 0(-4.5,2.475) 0(4.5,2.475)
  rect 0.3x1.15 smd: A1(3.35,-2.473) A4(2.55,-2.471) A5(1.25,-2.475) A6(0.25,-2.475) A7(-0.25,-2.473) A9(-2.55,-2.475) A12(-3.35,-2.475) B1(-3.05,-2.475) B4(-2.25,-2.475) B5(-1.75,-2.475) B6(-0.75,-2.475) B7(0.75,-2.473) B9(2.25,-2.471) B12(3.05,-2.473)
  rect 0.3x1.148 smd: A8(1.75,-2.475) B8(-1.25,-2.475)
  round 0.75 hole 0.75 unplated: ""(-2.89,-1.175) ""(2.89,-1.175)
  silkscreen extent -4.56,-2.75 4.5,5.08, body extent -4.45,-2.87 4.49,5.03, height 3.25
XTAL-3225-4P [mm] "3.2*2.5*0.7mm(长宽高)                             淘宝ID:黄晶宝石"
  rect 1.3x1.2 smd: 1(-1.05,-0.85) 2(1.05,-0.85) 3(1.05,0.85) 4(-1.05,0.85)
  silkscreen extent -2.03,-1.75 1.91,1.65, body extent -1.6,-1.25 1.6,1.25, height 0.7